# Altium PCB PCB-15_19_prototyp1.PcbDoc (part 1 of 4)
Units mm, origin at the board's own origin, x right, y up, seen from the top; angles counter-clockwise.
Board outline 190 x 150 mm, 8 copper layers (Top Layer, VCC3V3, Layer 2, layer 3, layer 4, layer 5, GND, Bottom Layer), stack 1.682 mm thick; 129 components, 396 nets, 1206 pads, 615 vias.
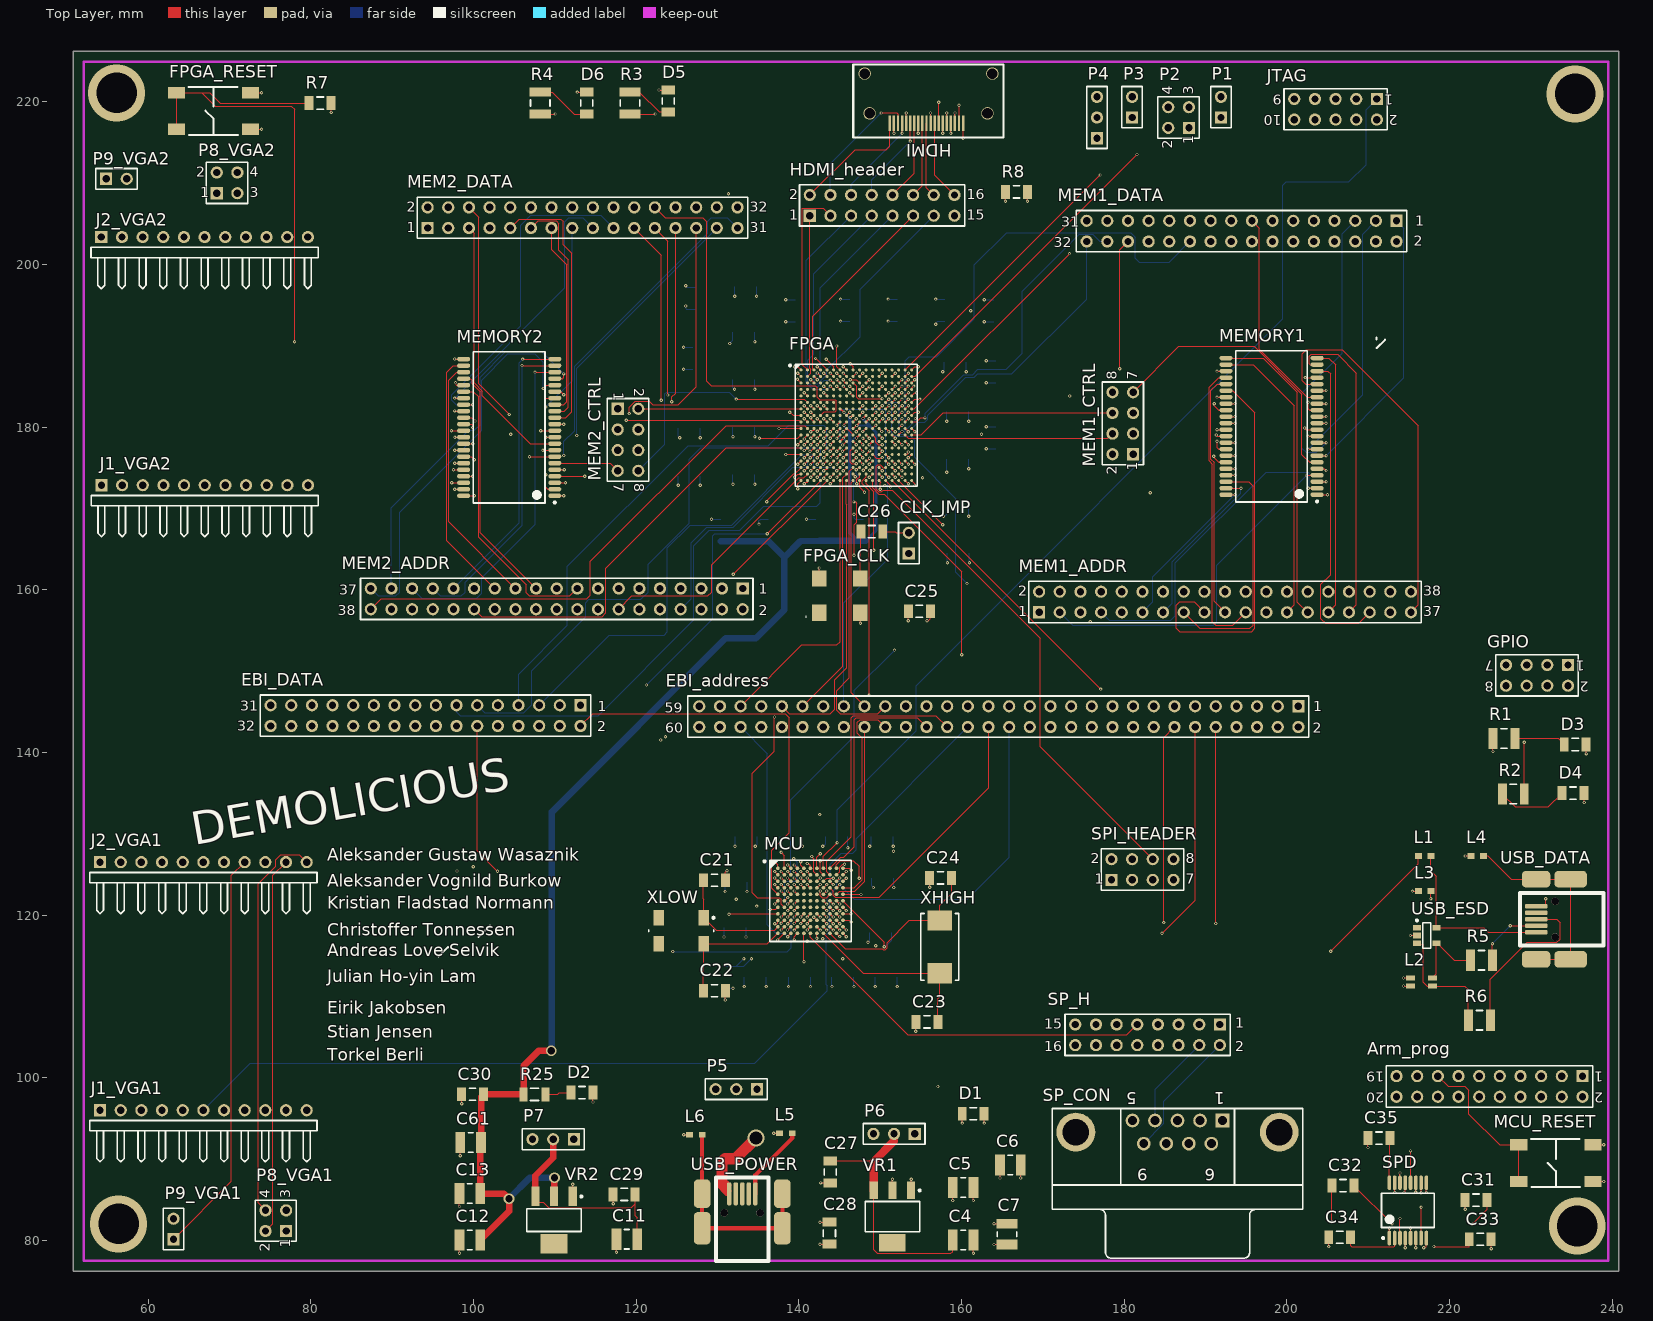
[diagram p0: Top Layer view]
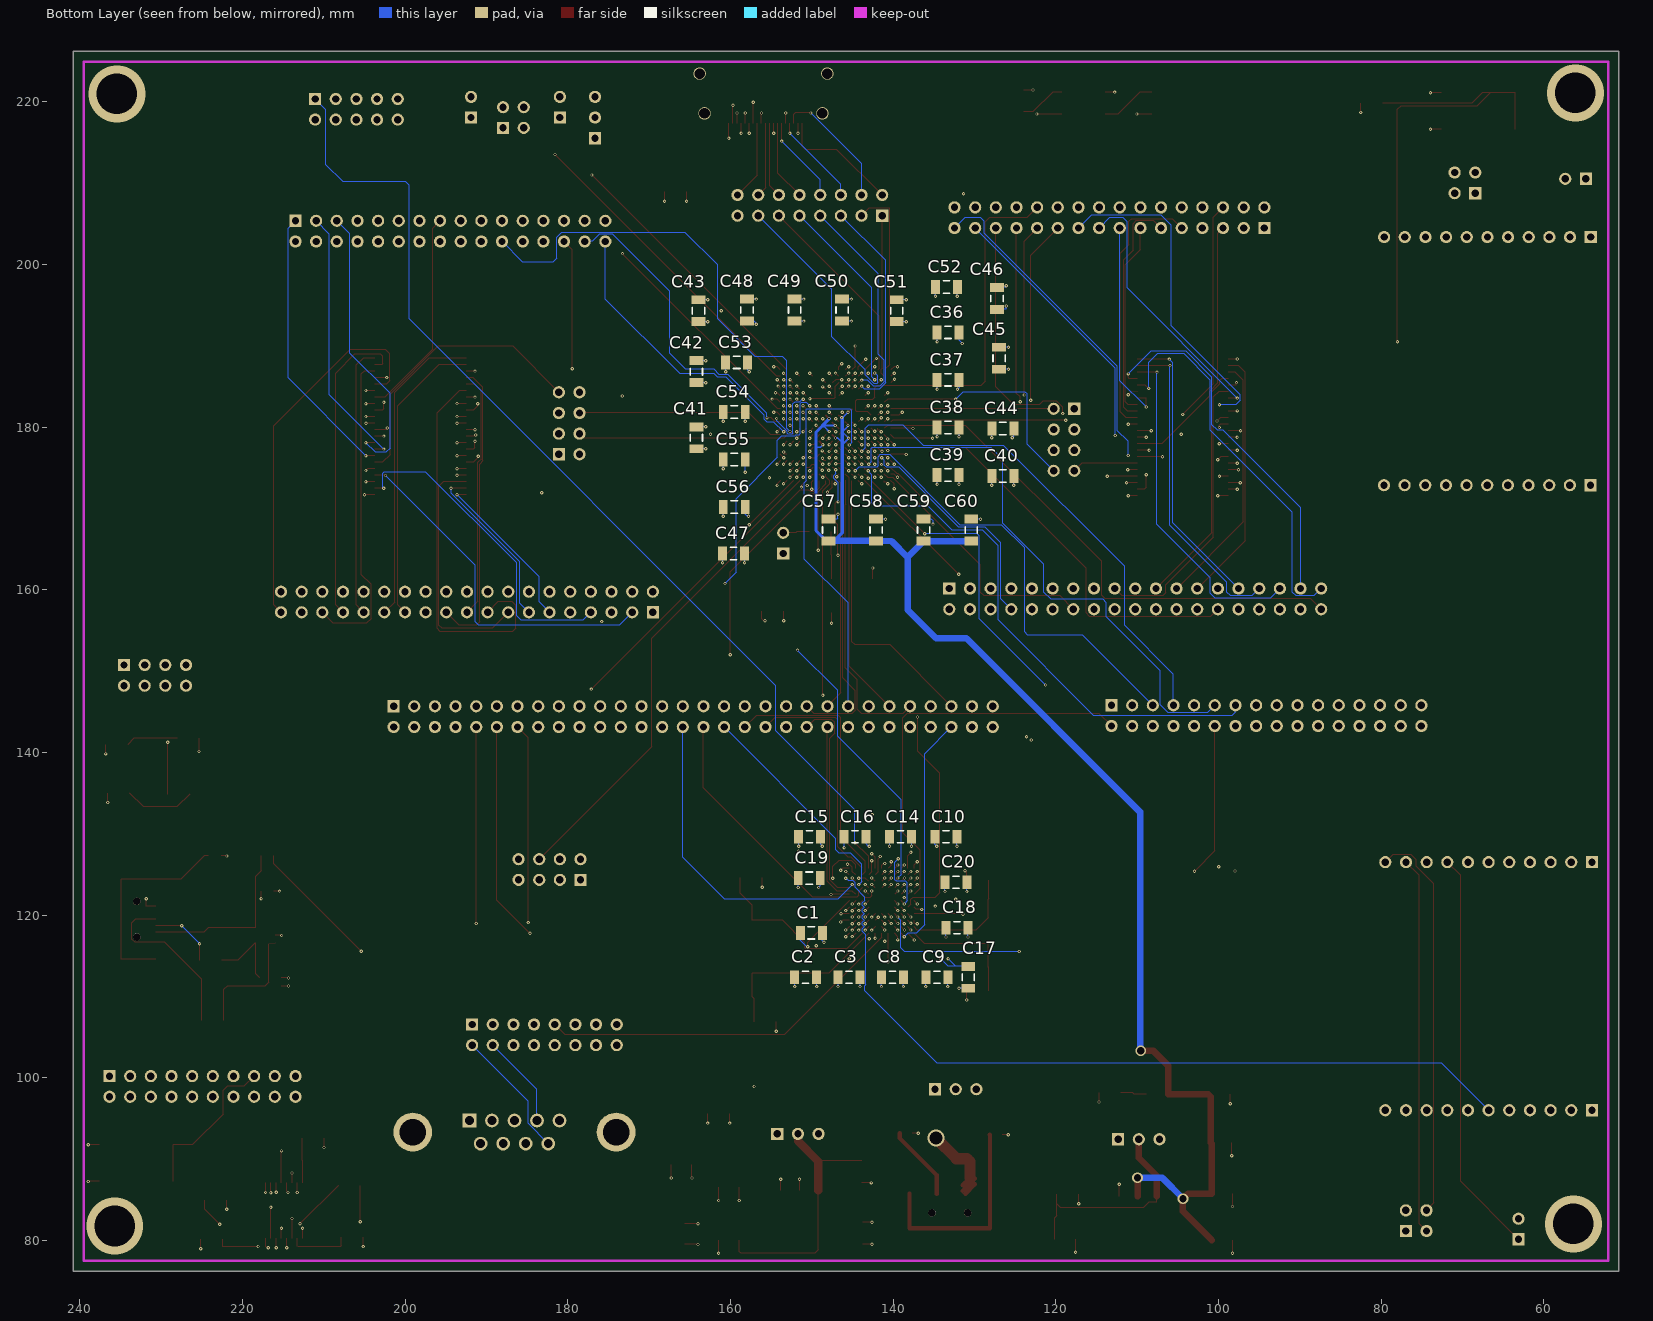
[diagram p1: Bottom Layer view, seen from below]
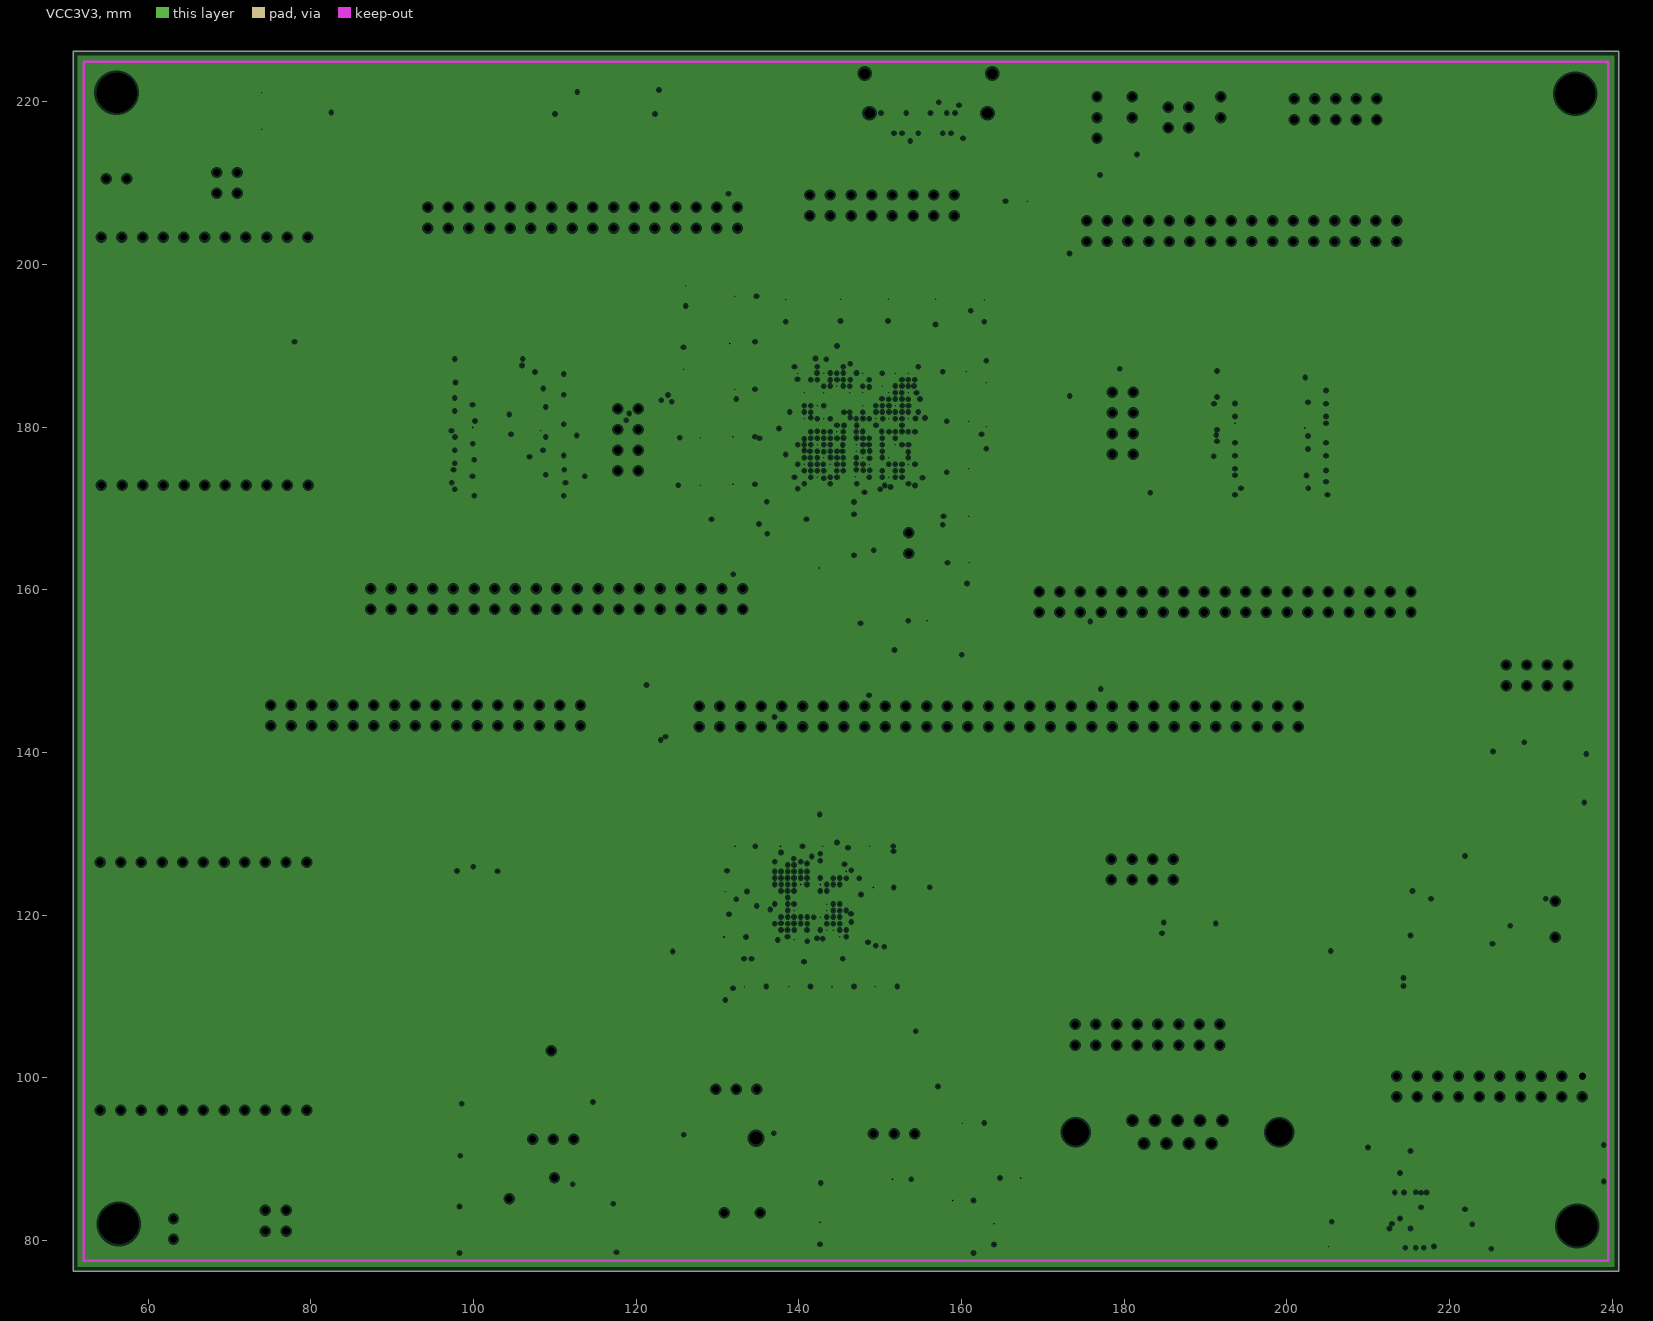
[diagram p2: VCC3V3, clearances drawn from the general rule]
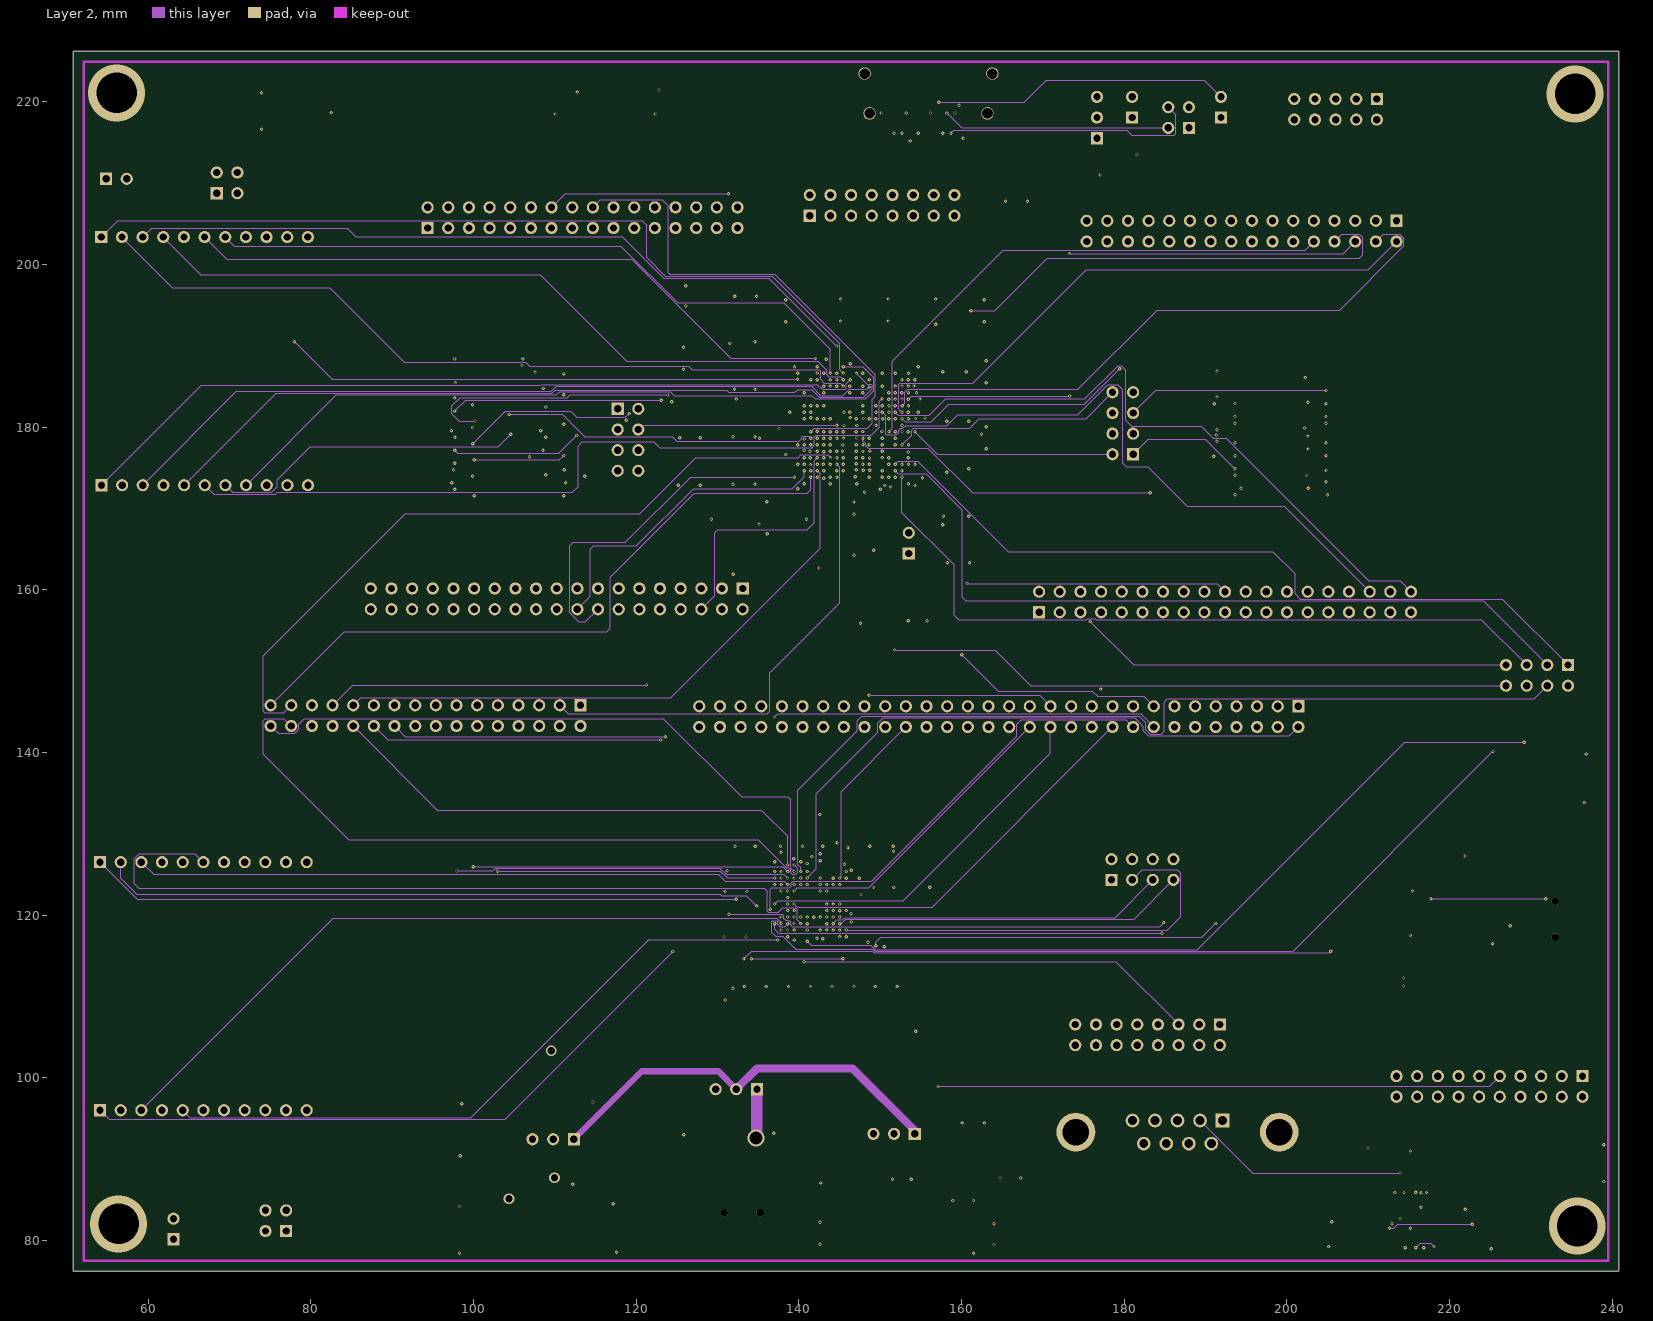
[diagram p3: Layer 2]
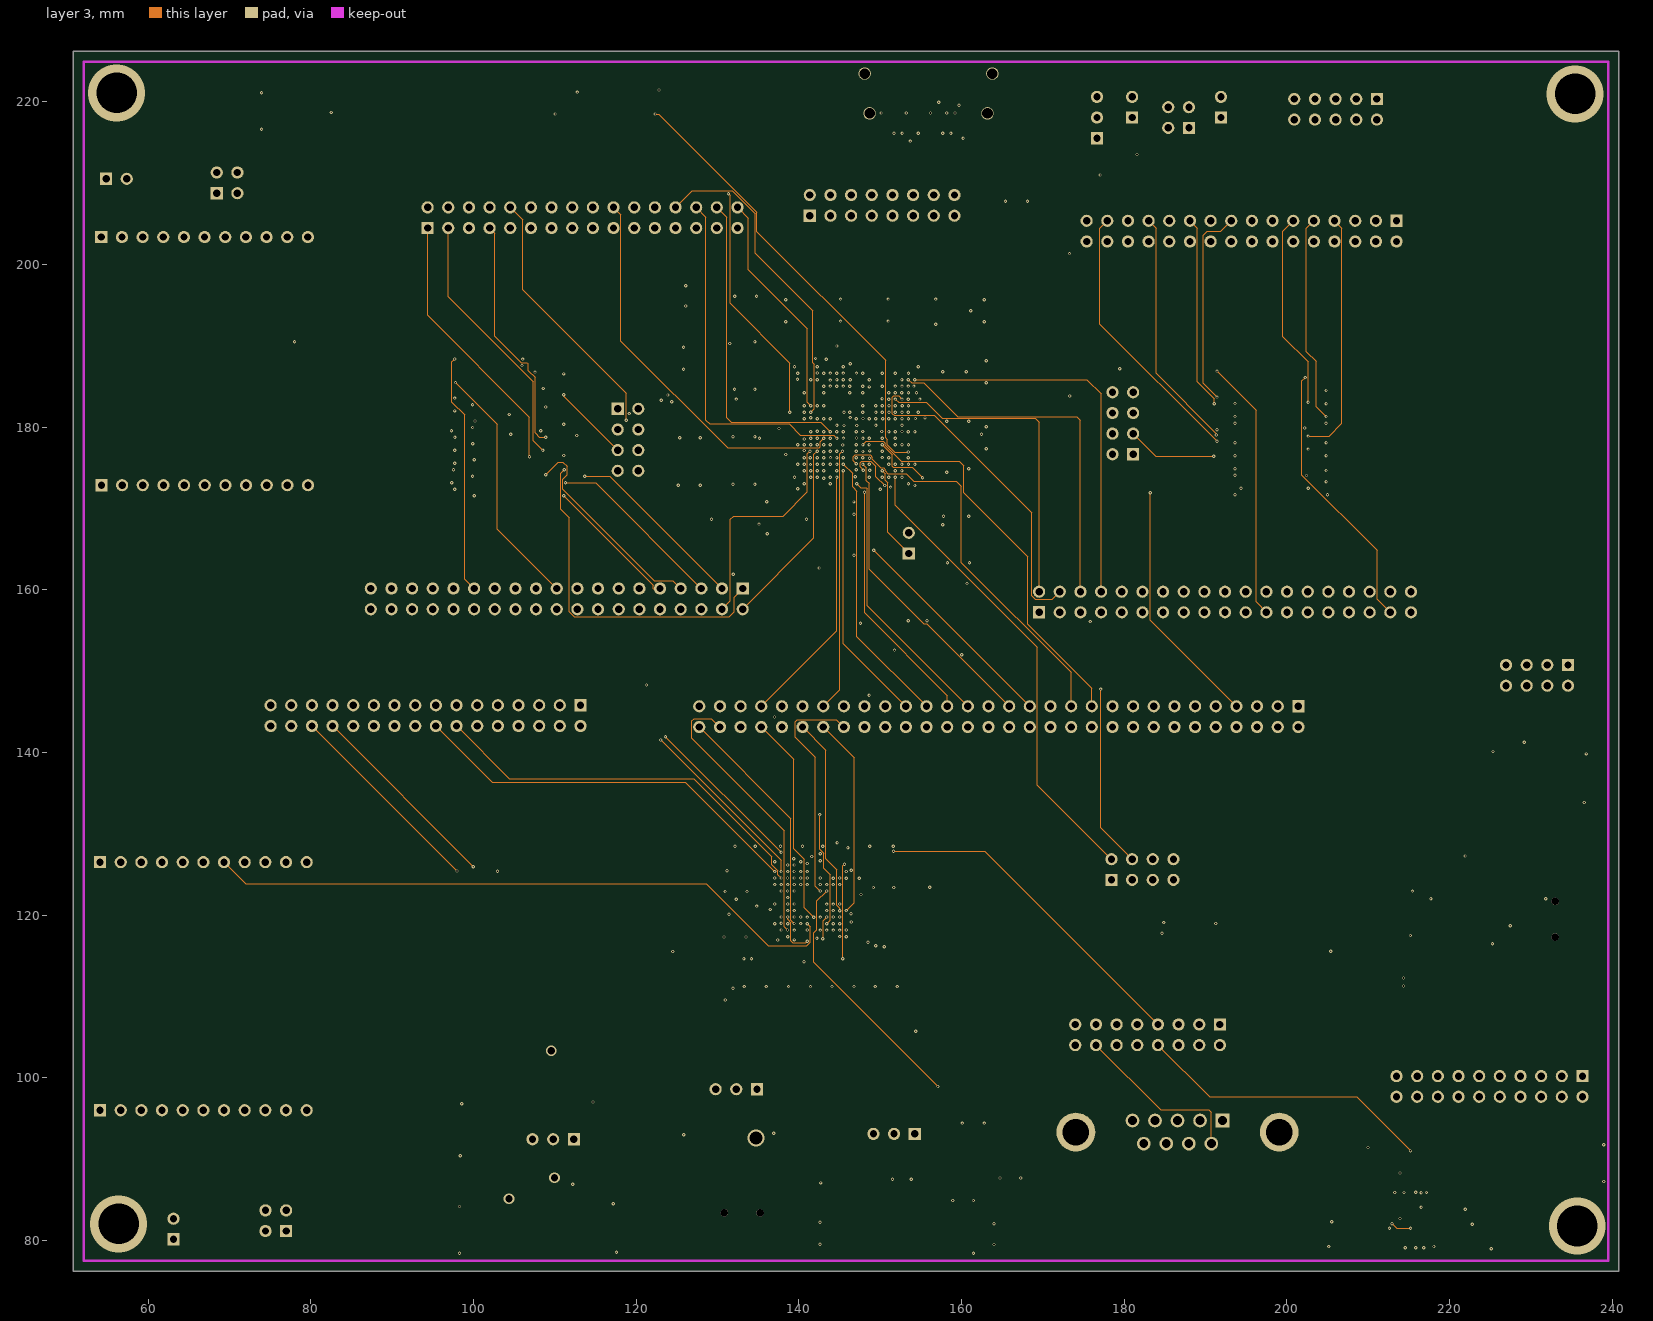
[diagram p4: layer 3]
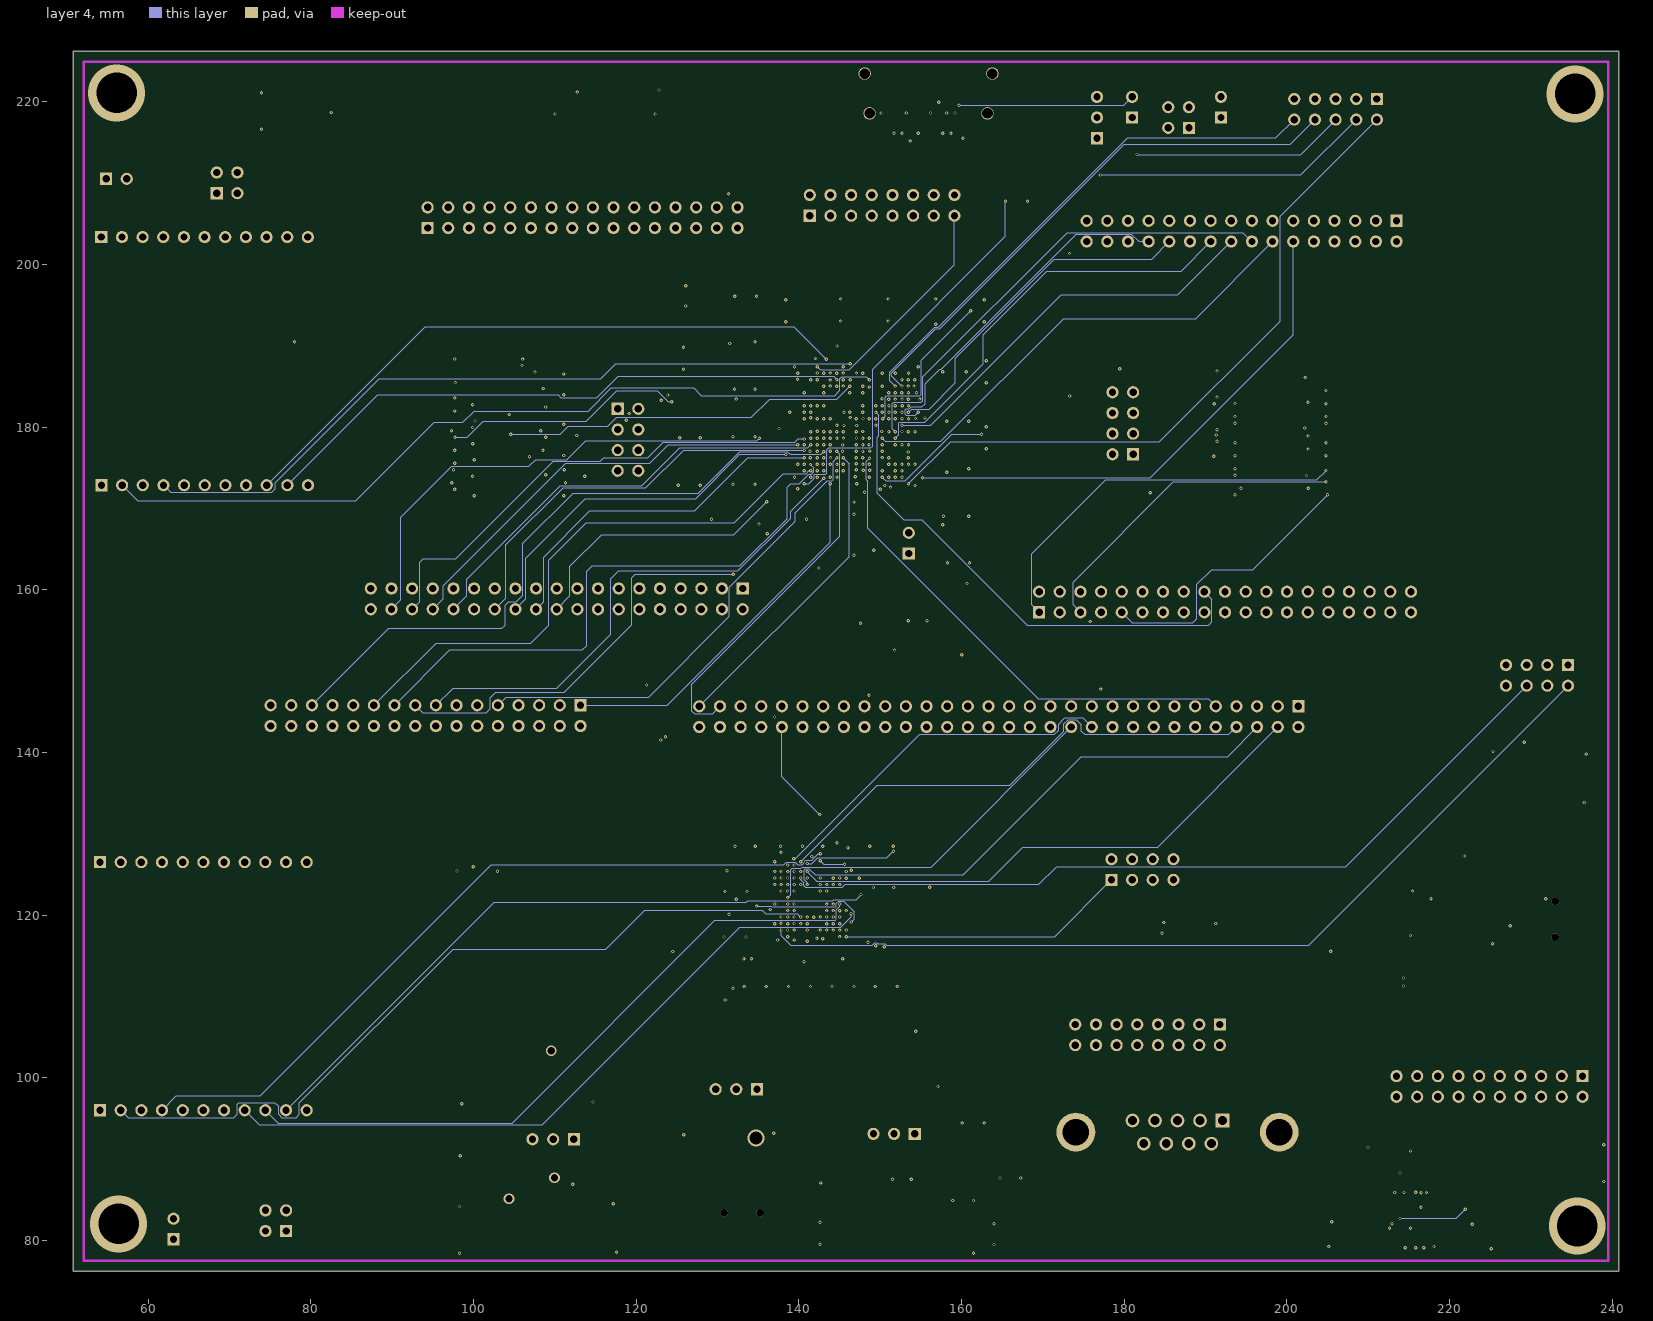
[diagram p5: layer 4]
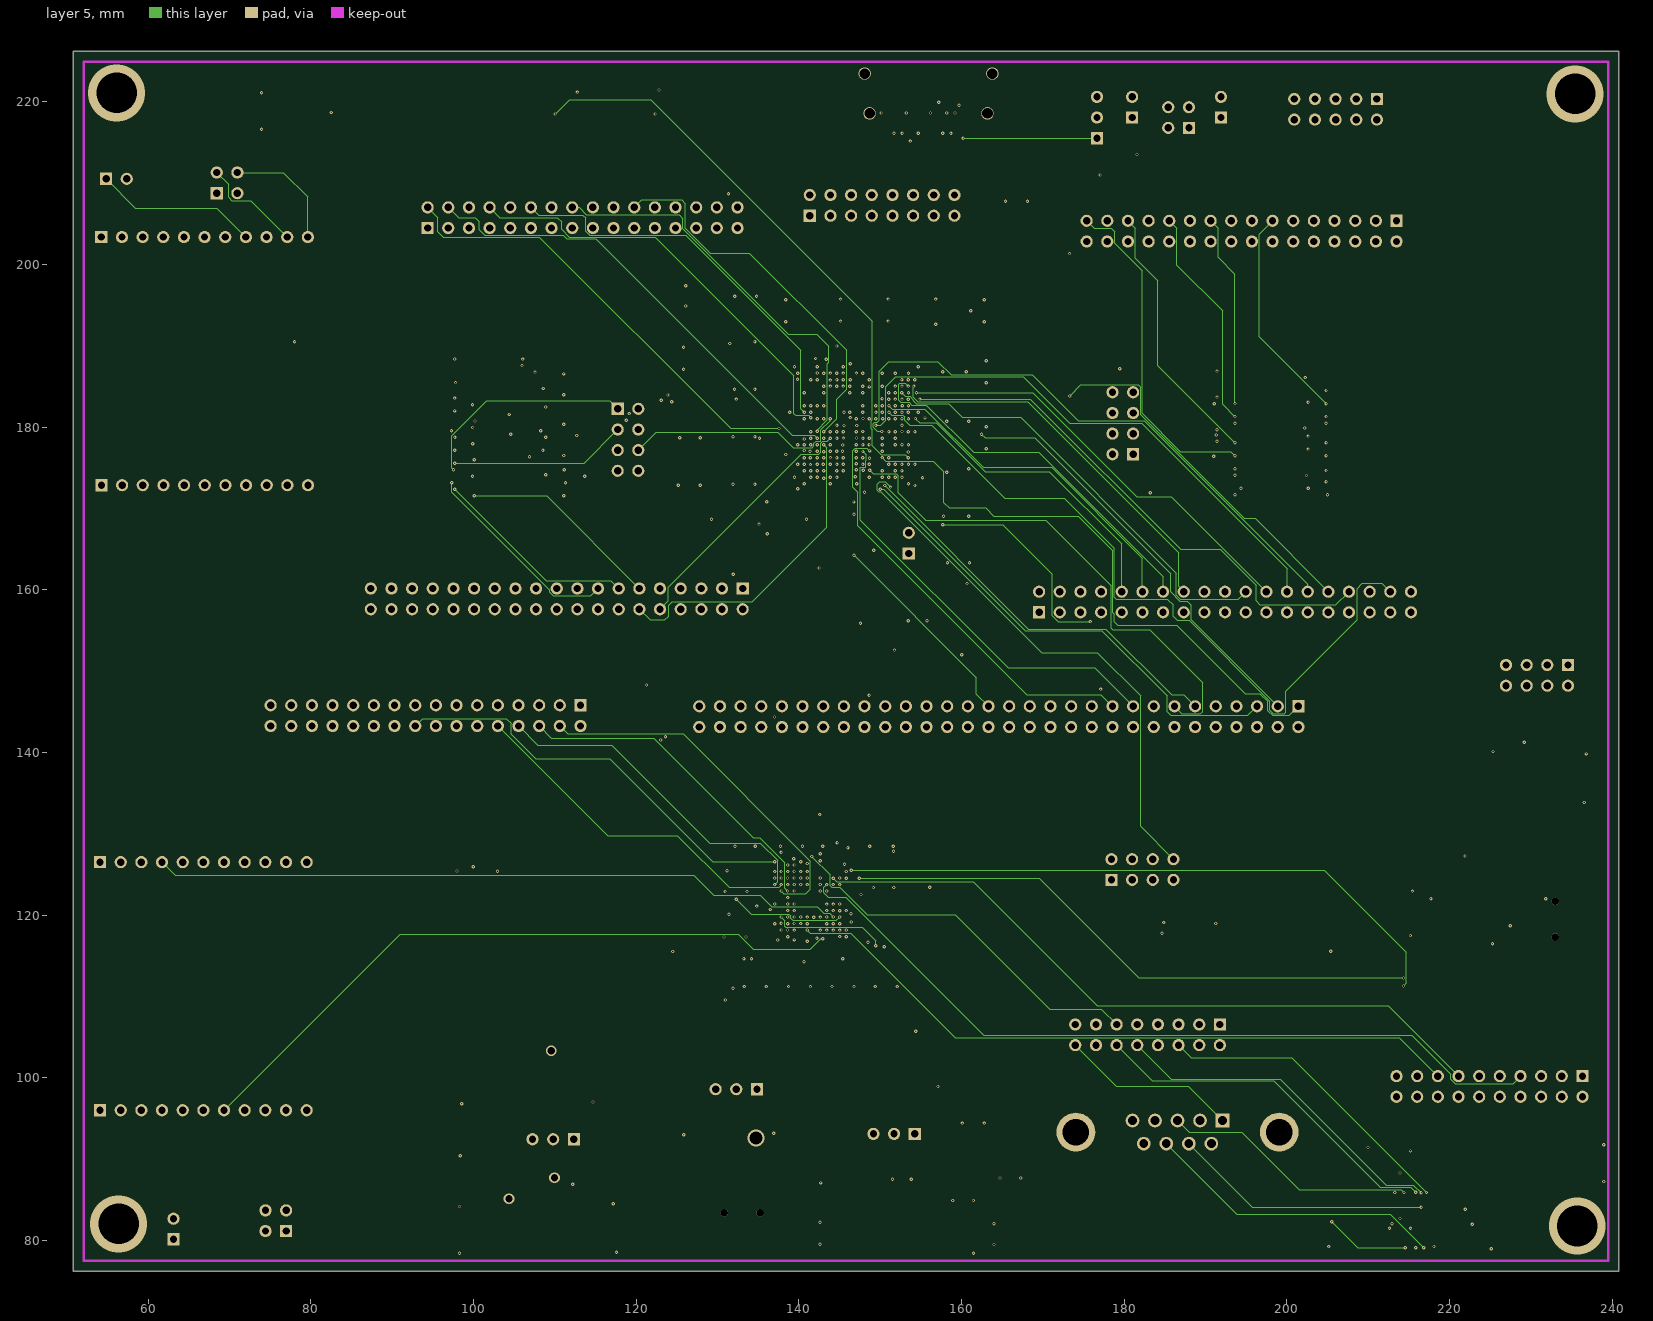
[diagram p6: layer 5]
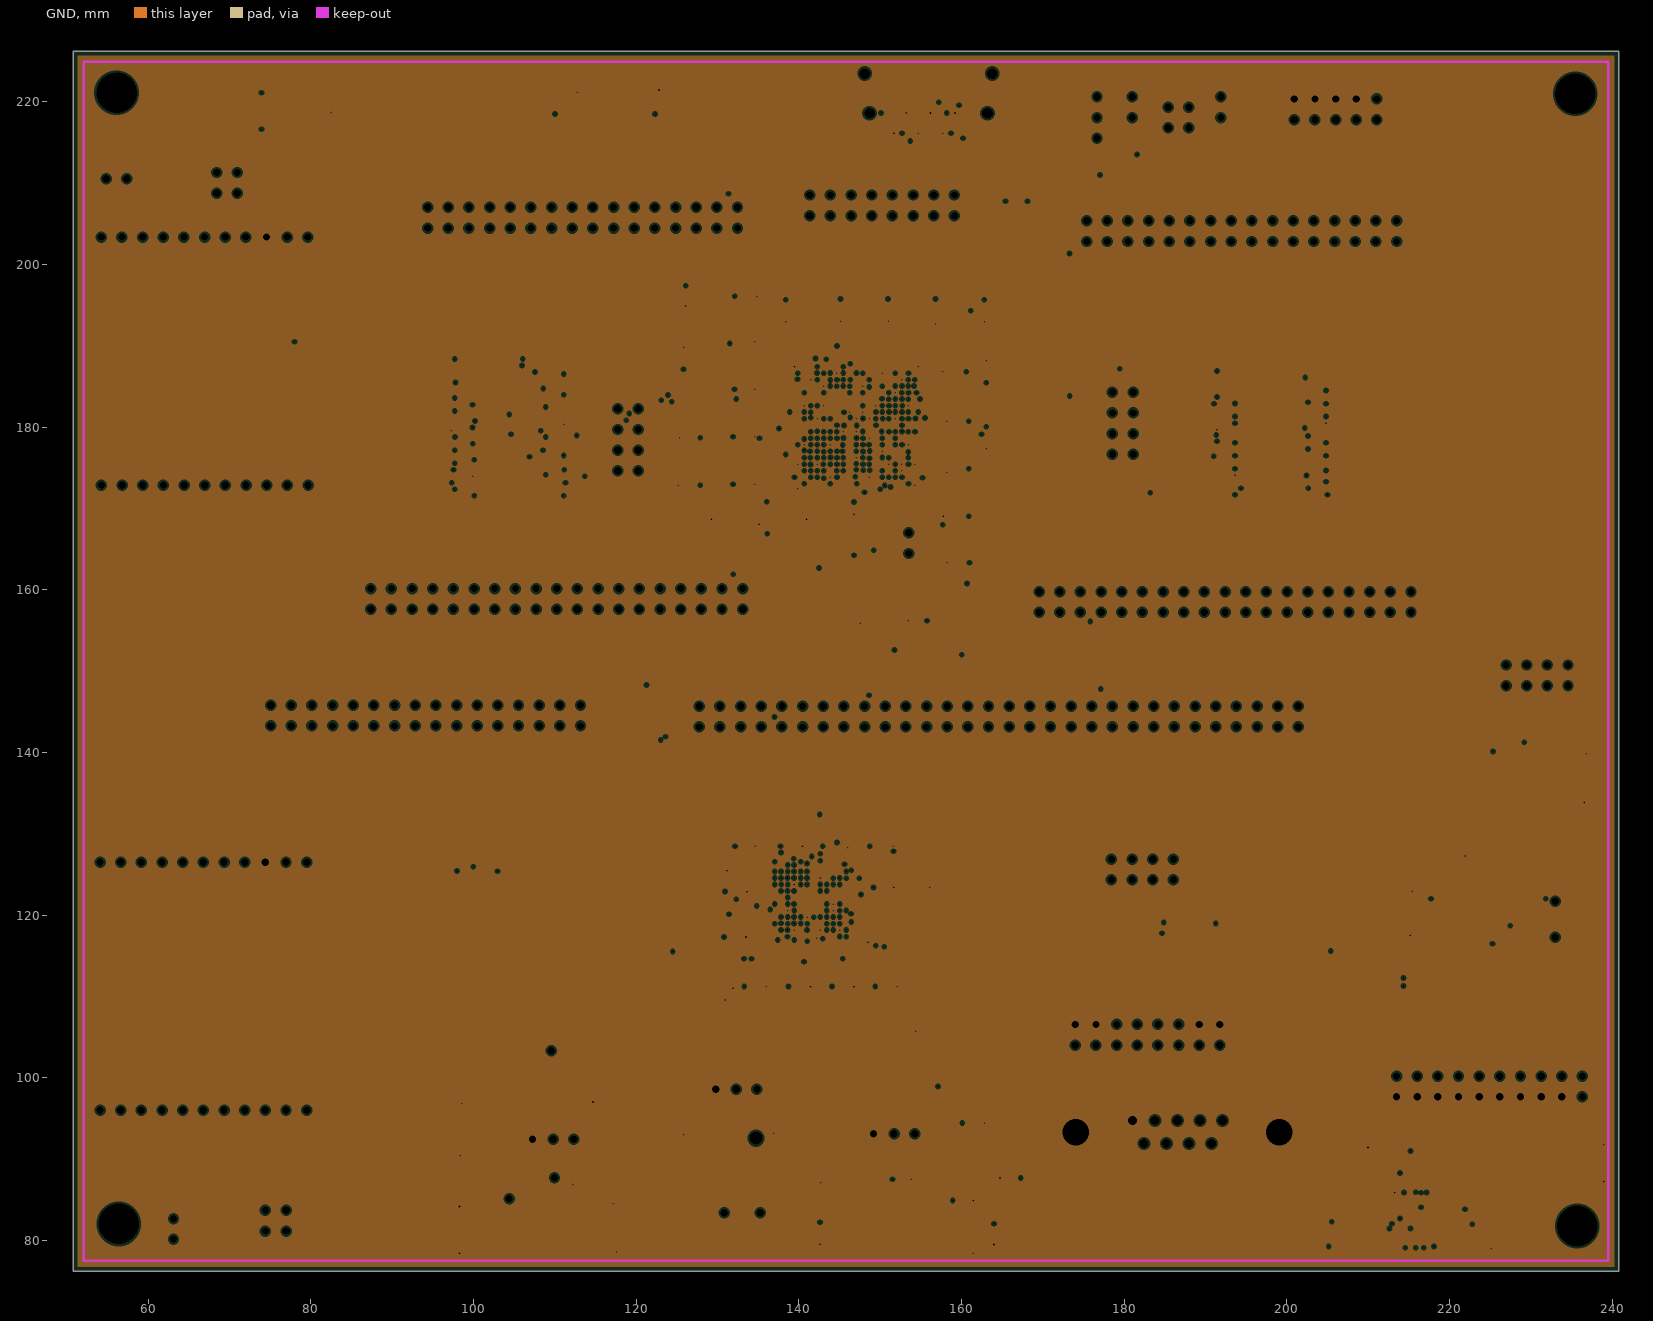
[diagram p7: GND, clearances drawn from the general rule]

## Layer stack, top to bottom
Top Solder: solder mask 0.0102, Solder Resist, Dk 3.5
Top Layer: signal copper 0.0356
Dielectric 1: core 0.254, FR-4, Dk 4.2
VCC3V3: plane copper 0.0356, net 3.3V
Dielectric 6: prepreg 0.127, Dk 4.2
Layer 2: signal copper 0.0356
Dielectric 4: core 0.254, Dk 4.2
layer 3: signal copper 0.036
Dielectric 5: prepreg 0.127, Dk 4.2
layer 4: signal copper 0.036
Dielectric 7: core 0.254, Dk 4.2
layer 5: signal copper 0.0356
Dielectric3: prepreg 0.127, FR-4, Dk 4.2
GND: plane copper 0.0356, net GND
Dielectric2: core 0.254, FR-4, Dk 4.2
Bottom Layer: signal copper 0.0356
Bottom Solder: solder mask 0.0102, Solder Resist, Dk 3.5

## Board outline
50.8,76.2 240.8,76.2 240.8,226.2 50.8,226.2

## Design rules (kind name [scope] priority, off if disabled: settings)
Clearance FPGA_and_MCU [All] p1: gap=0.1
Clearance [All] p2: gap=0.1
MinimumAnnularRing [All] p1: minimumring=0.1
MinimumSolderMaskSliver [All] p1: minsoldermaskwidth=0.1
PlaneClearance [All] p1: clearance=0.254
PlaneConnect [All] p1: planeconnectstyle=Direct reliefexpansion=0.508 reliefentries=4 reliefconductorwidth=0.254 reliefairgap=0.254
PolygonConnect [All] p1: connectstyle=Relief reliefconductorwidth=0.254 reliefentries=4 polygonreliefangle="90 Angle" airgapwidth=0.254
RoutingVias [All] p1: holewidth=0.2 width=0.4 viastyle="Through Hole" minholewidth=0.2 minwidth=0.35 maxholewidth=1 maxwidth=3
SMDNeckDown [All] p1: percent=100.000
SolderMaskExpansion SolderMaskExpansion_1 [HasFootprint('CSG324')  Or HasFootprint('ENMR-BGA112')] p1: expansion=0.06
SolderMaskExpansion [All] p2: expansion=0.102
UnpouredPolygon [All] p1: allowunpoured=FALSE
Width Small_lines [HasFootprint('HDR2X30') or HasFootprint('HDR2x16') or HasFootprint('HDR2X4') or HasFootprint('ENMR-BGA112') or HasFootprint('CSG324') or HasFootprint('HDR2X19') or HasFootprint('AS7C38098A-10TIN')] p1: maxlimit=0.2 minlimit=0.1 preferedwidth=0.1
Width [All] p2: maxlimit=3 minlimit=0.1 preferedwidth=0.1
26 further rules are at their usual default settings.

## Classes and differential pairs
channel class VGA: VGA1 VGA2
channel class SRAM: Data_mem1 Data_mem2
net class DATA[15..0]: DATA0 DATA1 DATA2 DATA3 DATA4 DATA5 DATA6 DATA7 DATA8 DATA9 DATA10 DATA11 DATA12 DATA13 DATA14 DATA15
net class DATA1.BUS[0..15]: DATA1.BUS0 DATA1.BUS1 DATA1.BUS2 DATA1.BUS3 DATA1.BUS4 DATA1.BUS5 DATA1.BUS6 DATA1.BUS7 DATA1.BUS8 DATA1.BUS9 DATA1.BUS10 DATA1.BUS11 DATA1.BUS12 DATA1.BUS13 DATA1.BUS14 DATA1.BUS15
net class DATA1.ADDR[0..18]: DATA1.ADDR0 DATA1.ADDR1 DATA1.ADDR2 DATA1.ADDR3 DATA1.ADDR4 DATA1.ADDR5 DATA1.ADDR6 DATA1.ADDR7 DATA1.ADDR8 DATA1.ADDR9 DATA1.ADDR10 DATA1.ADDR11 DATA1.ADDR12 DATA1.ADDR13 DATA1.ADDR14 DATA1.ADDR15 DATA1.ADDR16 DATA1.ADDR17 DATA1.ADDR18
net class DATA0.BUS[0..15]: DATA0.BUS0 DATA0.BUS1 DATA0.BUS2 DATA0.BUS3 DATA0.BUS4 DATA0.BUS5 DATA0.BUS6 DATA0.BUS7 DATA0.BUS8 DATA0.BUS9 DATA0.BUS10 DATA0.BUS11 DATA0.BUS12 DATA0.BUS13 DATA0.BUS14 DATA0.BUS15
net class DATA0.ADDR[0..18]: DATA0.ADDR0 DATA0.ADDR1 DATA0.ADDR2 DATA0.ADDR3 DATA0.ADDR4 DATA0.ADDR5 DATA0.ADDR6 DATA0.ADDR7 DATA0.ADDR8 DATA0.ADDR9 DATA0.ADDR10 DATA0.ADDR11 DATA0.ADDR12 DATA0.ADDR13 DATA0.ADDR14 DATA0.ADDR15 DATA0.ADDR16 DATA0.ADDR17 DATA0.ADDR18
net class A[25..0]: A0 A1 A2 A3 A4 A5 A6 A7 A8 A9 A10 A11 A12 A13 A14 A15 A16 A17 A18 A19 A20 A21 A22 A23 A24 A25
component class VGA2: J1_VGA2 J2_VGA2 P8_VGA2 P9_VGA2
component class VGA1: J1_VGA1 J2_VGA1 P8_VGA1 P9_VGA1
component class USB_power: L5 L6 USB_POWER
component class USB_data: L1 L2 L3 L4 R5 R6 USB_DATA USB_ESD
component class Serial: C31 C32 C33 C34 C35 SP_CON SP_H SPD
component class Power_regulator: C4 C5 C6 C7 C11 C12 C13 C27 C28 C29 C30 C61 D1 D2 P5 P6 P7 R25 VR1 VR2
component class OSCILLATOR: C21 C22 C23 C24 C25 C26 FPGA_CLK XHIGH XLOW
component class MCU: Arm_prog C1 MCU MCU_RESET SPI_HEADER
component class MCU_IO: C2 C3 C8 C9 C10 C14 C15 C16 C17 C18 C19 C20
component class LEDs: D3 D4 D5 D6 R1 R2 R3 R4
component class JTAG: JTAG R8
component class FPGA_VCC: C36 C37 C38 C39 C40 C41 C42 C43 C44 C45 C46 C47 C48 C49 C50 C51 C52 C53 C54 C55 C56 C57 C58 C59 C60
component class FPGA_BANK_3: FPGA_RESET R7
component class FPGA_BANK_2: CLK_JMP EBI_address EBI_DATA GPIO
component class FPGA_BANK_0: FPGA
component class Data_mem2: MEM2_ADDR MEM2_CTRL MEM2_DATA MEMORY2
component class Data_mem1: MEM1_ADDR MEM1_CTRL MEM1_DATA MEMORY1

## Components (designator, comment, footprint, x,y, rotation, side; value= is the part's Value field where it differs from the comment)
Arm_prog "Header 10X2" HDR2X10 236.347,100.203 r180 top
C1 "" C1206 150.065,117.817 r180 bottom
C2 "Ciovdd_0" C1206 150.76,112.356 r180 bottom
C3 "Ciovdd_1" C1206 145.426,112.356 r180 bottom
C4 "1210" CAPC1210(3225)105_L 160.19,80.04 r180 top
C5 "1210" CAPC1210(3225)105_L 160.19,86.51 r180 top
C6 "1210" CAPC1210(3225)105_L 166.01,89.28 r0 top
C7 "1210" CAPC1210(3225)105_L 165.6,80.78 r90 top
C8 "Ciovdd_2" C1206 140.092,112.356 r180 bottom
C9 "Ciovdd_3" C1206 134.631,112.356 r180 bottom
C10 "Ciovdd_4" C1206 133.508,129.628 r180 bottom
C11 "1210" CAPC1210(3225)105_L 118.85,80.15 r0 top
C12 "1210" CAPC1210(3225)105_L 99.55,80.04 r0 top
C13 "1210" CAPC1210(3225)105_L 99.55,85.77 r0 top
C14 "Ciovdd_5" C1206 139.096,129.628 r180 bottom
C15 "Ciovdd_6" C1206 150.272,129.628 r180 bottom
C16 "Cdreg" C1206 144.684,129.628 r180 bottom
C17 "Cvregi" C1206 130.761,112.356 r90 bottom
C18 "Cavdd_0" C1206 132.158,118.452 r180 bottom
C19 "Cavdd_1" C1206 150.319,124.548 r180 bottom
C20 "Cavdd_2" C1206 132.285,124.04 r0 bottom
C21 "CL1" C1206 129.618,124.294 r180 top
C22 "CL2" C1206 129.618,110.705 r180 top
C23 "CL1" C1206 155.74,106.87 r0 top
C24 "CL2" C1206 157.44,124.57 r0 top
C25 "bypass cap" C1206 154.813,157.353 r180 top
C26 "bypass cap" C1206 148.971,167.148 r0 top
C27 "4.7uF" C1206 143.86,88.42 r90 top
C28 "10uF" C1206 143.76,80.89 r90 top
C29 "4.7uF" C1206 118.53,85.66 r0 top
C30 "10uF" C1206 99.9,97.97 r0 top
C31 "Ciovdd_5" C1206 223.266,84.963 r0 top
C32 "Ciovdd_5" C1206 206.883,86.741 r180 top
C33 "Ciovdd_5" C1206 223.774,80.137 r180 top
C34 "Ciovdd_5" C1206 206.502,80.391 r0 top
C35 "Ciovdd_5" C1206 211.328,92.583 r0 top
C36 "Cvcco_0" C1206 133.251,191.637 r0 bottom
C37 "Cvcco_0" C1206 133.251,185.795 r0 bottom
C38 "Cvcco_0" C1206 133.251,179.953 r180 bottom
C39 "Cvcco_0" C1206 133.251,174.111 r180 bottom
C40 "Cvcco_1" C1206 126.52,173.984 r180 bottom
C41 "Cvcco_1" C1206 164.192,178.683 r270 bottom
C42 "Cvcco_1" C1206 164.192,186.811 r90 bottom
C43 "Cvcco_1" C1206 163.938,194.304 r90 bottom
C44 "Cvcco_2" C1206 126.52,179.826 r180 bottom
C45 "Cvcco_2" C1206 126.981,188.462 r90 bottom
C46 "Cvcco_2" C1206 127.235,195.828 r90 bottom
C47 "Cvcco_2" C1206 159.62,164.459 r0 bottom
C48 "Cvcco_3" C1206 157.969,194.384 r270 bottom
C49 "Cvcco_3" C1206 152.127,194.384 r270 bottom
C50 "Cvcco_3" C1206 146.285,194.384 r90 bottom
C51 "Cvcco_3" C1206 139.554,194.304 r90 bottom
C52 "Cvccaux" C1206 133.458,197.225 r180 bottom
C53 "Cvccaux" C1206 159.239,187.954 r0 bottom
C54 "Cvccaux" C1206 159.54,181.858 r180 bottom
C55 "Cvccaux" C1206 159.54,176.016 r180 bottom
C56 "Cvccaux" C1206 159.54,170.174 r180 bottom
C57 "Cvccint" C1206 147.936,167.333 r270 bottom
C58 "Cvccint" C1206 142.094,167.333 r270 bottom
C59 "Cvccint" C1206 136.252,167.333 r90 bottom
C60 "Cvccint" C1206 130.41,167.333 r90 bottom
C61 "1210" CAPC1210(3225)105_L 99.66,92.02 r0 top
CLK_JMP "Header 2" HDR1X2 153.524,164.459 r90 top (schematic designator FPGA_CLK_JMP)
D1 "LED2" C1206 161.44,95.58 r0 top
D2 "LED2" C1206 113.34,98.17 r0 top
D3 "LED2" C1206 235.458,140.97 r0 top
D4 "LED2" C1206 235.204,135.001 r0 top
D5 "LED2" C1206 123.952,220.091 r90 top
D6 "LED2" C1206 113.919,219.837 r90 top
EBI_address "EBI adr" HDR2X30 201.422,145.669 r180 top
EBI_DATA "Backup header for EBI Data" HDR2X16 113.157,145.796 r180 top
FPGA "XC6SLX45-2CSG324I" CSG324 147.07,180.23 r0 top
FPGA_CLK "120MHz" OSCI-4FPGA 145.034,159.274 r90 top
FPGA_RESET "FSM2JSMA" Button 72.6,216.62 r90 top
GPIO "Header 4X2" HDR2X4 234.569,150.749 r180 top
HDMI_header "Header 8X2" HDR2X8 141.351,205.994 r0 top
J1_VGA1 "Header 11H" HDR1X11H 54.09,96.012 r0 top (schematic designator J1)
J1_VGA2 "Header 11H" HDR1X11H 54.26,172.86 r0 top (schematic designator J1)
J2_VGA1 "Header 11H" HDR1X11H 54.09,126.51 r0 top (schematic designator J2)
J2_VGA2 "Header 11H" HDR1X11H 54.24,203.36 r0 top (schematic designator J2)
JTAG "JTAG" HDR2X5 211.074,220.345 r180 top
L1 "742792641" SMD-0603 216.938,127.271 r0 top
L2 "744232161" WE-CNSW-1206 216.557,111.777 r0 top
L3 "742792641" SMD-0603 216.938,122.953 r0 top
L4 "742792641" SMD-0603 223.415,127.271 r0 top
L5 "742792641" SMD-0603 138.42,93.18 r0 top
L6 "742792641" SMD-0603 127.35,92.99 r0 top
MCU "EFM32GG990F1024-BGA112" ENMR-BGA112 141.429,121.754 r0 top
MCU_RESET "FSM2JSMA" Button 237.617,87.249 r90 top
MEM1_ADDR "Header 19X2" HDR2X19 169.545,157.226 r0 top (schematic designator MEM_ADDR_JUMPER)
MEM1_CTRL "Header 4X2" HDR2X4 181.102,176.657 r90 top (schematic designator MEM_CONTROL_JUMPER)
MEM1_DATA "Header 16X2" HDR2X16 213.487,205.359 r180 top (schematic designator MEM_BUS_JUMPER)
MEM2_ADDR "Header 19X2" HDR2X19 133.096,160.147 r180 top (schematic designator MEM_ADDR_JUMPER)
MEM2_CTRL "Header 4X2" HDR2X4 117.729,182.245 r270 top (schematic designator MEM_CONTROL_JUMPER)
MEM2_DATA "Header 16X2" HDR2X16 94.361,204.47 r0 top (schematic designator MEM_BUS_JUMPER)
MEMORY1 "SRAM-AS7C38098A" AS7C38098A-10TIN 198.12,180.086 r180 top (schematic designator MEMORY)
MEMORY2 "SRAM-AS7C38098A" AS7C38098A-10TIN 104.394,179.959 r180 top (schematic designator MEMORY)
P1 "CEC" HDR1X2 191.897,218.059 r90 top
P2 "SCL_SCD" HDR2X2 187.96,216.789 r90 top
P3 "+5V" HDR1X2 180.975,218.059 r90 top
P4 "Header 3" HDR1X3 176.657,215.519 r90 top
P5 "PW_5V" HDR1X3 134.85,98.6 r180 top
P6 "PW_H2" HDR1X3 154.25,93.1 r180 top
P7 "PW_H3" HDR1X3 112.34,92.44 r180 top
P8_VGA1 "Header 2X2" HDR2X2 76.962,81.153 r90 top (schematic designator P8)
P8_VGA2 "Header 2X2" HDR2X2 68.43,208.76 r0 top (schematic designator P8)
P9_VGA1 "Emergency 3.3V supply at most 400mA" HDR1X2 63.119,80.137 r90 top (schematic designator P9)
P9_VGA2 "Emergency 3.3V supply at most 400mA" HDR1X2 54.83,210.52 r0 top (schematic designator P9)
R1 "Res3" 14-1210 226.695,141.732 r0 top
R2 "Res3" 14-1210 227.838,134.874 r180 top
R3 "Res3" 14-1210 119.253,219.837 r90 top
R4 "Res3" 14-1210 108.204,219.837 r90 top
R5 "R_usb_dm" 14-1210 223.923,114.444 r0 top
R6 "R_usb_dp" 14-1210 223.669,107.078 r0 top
R7 "Res1" C1206 81.153,219.837 r0 top
R8 "Res3" C1206 166.751,208.915 r0 top
R25 "Res 1206" RESC1206(3216)_L 107.51,97.96 r0 top
SP_CON "D Connector 9" DSUB1.385-2H9 186.563,83.82 r180 top
SP_H "Header 8X2" HDR2X8 191.77,106.553 r180 top
SPD "MAX3232CDBE4" TI-DB16_L 214.884,83.693 r90 top
SPI_HEADER "SPI_header" HDR2X4 178.435,124.333 r0 top
USB_DATA "67503-1020" MOLX-67503-1020_V 230.67,117.89 r180 top
USB_ESD "#NAME?" SOT95P275X140-5N 217.192,117.492 r0 top
USB_POWER "67503-1020" MOLX-67503-1020_V 131.445,85.725 r90 top
VR1 "ADP3339AKCZ-3.3-R7" ADI-KC-3_M 151.511,82.931 r270 top
VR2 "NCP566-1.2" SOT223_N 109.906,82.506 r270 top
XHIGH "48MHz" XTAL-85 157.33,116.09 r90 top
XLOW "32.783KHz" MC-306 125.554,118.071 r270 top
? "HDMI_connector" HDMI-type-A 163.195,218.567 r180 top

## Footprints (in the part's own frame and the unit in brackets; to place one, negate y for a bottom-side part, rotate by r counter-clockwise, add the part's x,y. Pads: shape width x height; smd on the part's side, far side on the other; paste and mask are expansions set on the pad)
14-1210 [mm] "Chip Resistor, Body 3.2x2.5mm, IPC High Density"
  rect 1.1x2.6 smd: 1(-1.35,0) 2(1.35,0)
  silkscreen extent -0.4,-1.2 0.4,1.2, body extent -1.68,-1.32 1.68,1.32, height 0.9
ADI-KC-3_M [mm] "SOT223, 4-Leads, Body 6.5x3.5mm, Pitch 2.3mm, IPC Low Density"
  rect 2.15x1 smd: 1(-3.225,2.3) 2(-3.225,0) 3(-3.225,-2.3)
  rect 2.15x3.25 smd: 4(3.225,0)
  silkscreen extent -3.35,-3.35 1.85,3.48, body extent -1.85,-3.35 1.85,3.35, height 1.8
AS7C38098A-10TIN [mm] "TSOPII, 44-Leads, Body 18,41x10,16mm, Pitch 0,80mm, IPC Medium Density"
  oval 1.6x0.55 smd: 1(-5.6,8.4) 2(-5.6,7.6) 3(-5.6,6.8) 4(-5.6,6) 5(-5.6,5.2) 6(-5.6,4.4) 7(-5.6,3.6) 8(-5.6,2.8) 9(-5.6,2) 10(-5.6,1.2) 11(-5.6,0.4) 12(-5.6,-0.4) 13(-5.6,-1.2) 14(-5.6,-2) 15(-5.6,-2.8) 16(-5.6,-3.6) 17(-5.6,-4.4) 18(-5.6,-5.2) 19(-5.6,-6) 20(-5.6,-6.8) 21(-5.6,-7.6) 22(-5.6,-8.4) 23(5.6,-8.4) 24(5.6,-7.6) 25(5.6,-6.8) 26(5.6,-6) 27(5.6,-5.2) 28(5.6,-4.4) 29(5.6,-3.6) 30(5.6,-2.8) 31(5.6,-2) 32(5.6,-1.2) 33(5.6,-0.4) 34(5.6,0.4) 35(5.6,1.2) 36(5.6,2) 37(5.6,2.8) 38(5.6,3.6) 39(5.6,4.4) 40(5.6,5.2) 41(5.6,6) 42(5.6,6.8) 43(5.6,7.6) 44(5.6,8.4)
  silkscreen extent -5.72,-9.3 4.4,9.35, body extent -5.2,-9.3 5.2,9.3, height 1.2
Button [mm] "copied from 256 SoG"
  rect 1.4x2.1 smd: 1(0,9.1) 2(0,0) 3(4.5,9.1) 4(4.5,0)
  silkscreen extent -0.7,1.55 5.21,7.62
C1206 [mm] "Chip Capacitor, Body 3.2x1.6mm, IPC High Density"
  rect 1.1x1.7 smd: 1(-1.35,0) 2(1.35,0)
  silkscreen extent -0.4,-0.75 0.4,0.75, body extent -1.7,-0.9 1.7,0.9, height 1.3
CAPC1210(3225)105_L [mm] "Chip Capacitor, Body 3.2x2.5mm, Height 1.05mm, IPC High Density"
  rect 1.2x2.6 smd: 1(-1.275,0) 2(1.275,0)
  silkscreen extent -0.3,-1.2 0.3,1.2, body extent -1.7,-1.35 1.7,1.35, height 1.05
CSG324 [mm] "BGA, 324-Leads, Body 15x15mm, Pitch 0.8mm"
  round 0.36 smd: A1(-6.8,6.8) A2(-6,6.8) A3(-5.2,6.8) A4(-4.4,6.8) A5(-3.6,6.8) A6(-2.8,6.8) A7(-2,6.8) A8(-1.2,6.8) A9(-0.4,6.8) A10(0.4,6.8) A11(1.2,6.8) A12(2,6.8) A13(2.8,6.8) A14(3.6,6.8) A15(4.4,6.8) A16(5.2,6.8) A17(6,6.8) A18(6.8,6.8) B1(-6.8,6) B2(-6,6) B3(-5.2,6) B4(-4.4,6) B5(-3.6,6) B6(-2.8,6) B7(-2,6) B8(-1.2,6) B9(-0.4,6) B10(0.4,6) B11(1.2,6) B12(2,6) B13(2.8,6) B14(3.6,6) B15(4.4,6) B16(5.2,6) B17(6,6) B18(6.8,6) C1(-6.8,5.2) C2(-6,5.2) C3(-5.2,5.2) C4(-4.4,5.2) C5(-3.6,5.2) C6(-2.8,5.2) C7(-2,5.2) C8(-1.2,5.2) C9(-0.4,5.2) C10(0.4,5.2) C11(1.2,5.2) C12(2,5.2) C13(2.8,5.2) C14(3.6,5.2) C15(4.4,5.2) C16(5.2,5.2) C17(6,5.2) C18(6.8,5.2) D1(-6.8,4.4) D2(-6,4.4) D3(-5.2,4.4) D4(-4.4,4.4) D5(-3.6,4.4) D6(-2.8,4.4) D7(-2,4.4) D8(-1.2,4.4) D9(-0.4,4.4) D10(0.4,4.4) D11(1.2,4.4) D12(2,4.4) D13(2.8,4.4) D14(3.6,4.4) D15(4.4,4.4) D16(5.2,4.4) D17(6,4.4) D18(6.8,4.4) E1(-6.8,3.6) E2(-6,3.6) E3(-5.2,3.6) E4(-4.4,3.6) E5(-3.6,3.6) E6(-2.8,3.6) E7(-2,3.6) E8(-1.2,3.6) E9(-0.4,3.6) E10(0.4,3.6) E11(1.2,3.6) E12(2,3.6) E13(2.8,3.6) E14(3.6,3.6) E15(4.4,3.6) E16(5.2,3.6) E17(6,3.6) E18(6.8,3.6) F1(-6.8,2.8) F2(-6,2.8) F3(-5.2,2.8) F4(-4.4,2.8) F5(-3.6,2.8) F6(-2.8,2.8) F7(-2,2.8) F8(-1.2,2.8) F9(-0.4,2.8) F10(0.4,2.8) F11(1.2,2.8) F12(2,2.8) F13(2.8,2.8) F14(3.6,2.8) F15(4.4,2.8) F16(5.2,2.8) F17(6,2.8) F18(6.8,2.8) G1(-6.8,2) G2(-6,2) G3(-5.2,2) G4(-4.4,2) G5(-3.6,2) G6(-2.8,2) G7(-2,2) G8(-1.2,2) G9(-0.4,2) G10(0.4,2) G11(1.2,2) G12(2,2) G13(2.8,2) G14(3.6,2) G15(4.4,2) G16(5.2,2) G17(6,2) G18(6.8,2) H1(-6.8,1.2) H2(-6,1.2) H3(-5.2,1.2) H4(-4.4,1.2) H5(-3.6,1.2) H6(-2.8,1.2) H7(-2,1.2) H8(-1.2,1.2) H9(-0.4,1.2) H10(0.4,1.2) H11(1.2,1.2) H12(2,1.2) H13(2.8,1.2) H14(3.6,1.2) H15(4.4,1.2) H16(5.2,1.2) H17(6,1.2) H18(6.8,1.2) J1(-6.8,0.4) J2(-6,0.4) J3(-5.2,0.4) J4(-4.4,0.4) J5(-3.6,0.4) J6(-2.8,0.4) J7(-2,0.4) J8(-1.2,0.4) J9(-0.4,0.4) J10(0.4,0.4) J11(1.2,0.4) J12(2,0.4) J13(2.8,0.4) J14(3.6,0.4) J15(4.4,0.4) J16(5.2,0.4) J17(6,0.4) J18(6.8,0.4) K1(-6.8,-0.4) K2(-6,-0.4) K3(-5.2,-0.4) K4(-4.4,-0.4) K5(-3.6,-0.4) K6(-2.8,-0.4) K7(-2,-0.4) K8(-1.2,-0.4) K9(-0.4,-0.4) K10(0.4,-0.4) K11(1.2,-0.4) K12(2,-0.4) K13(2.8,-0.4) K14(3.6,-0.4) K15(4.4,-0.4) K16(5.2,-0.4) K17(6,-0.4) K18(6.8,-0.4) L1(-6.8,-1.2) L2(-6,-1.2) L3(-5.2,-1.2) L4(-4.4,-1.2) L5(-3.6,-1.2) L6(-2.8,-1.2) L7(-2,-1.2) L8(-1.2,-1.2) L9(-0.4,-1.2) L10(0.4,-1.2) L11(1.2,-1.2) L12(2,-1.2) L13(2.8,-1.2) L14(3.6,-1.2) L15(4.4,-1.2) L16(5.2,-1.2) L17(6,-1.2) L18(6.8,-1.2) M1(-6.8,-2) M2(-6,-2) M3(-5.2,-2) M4(-4.4,-2) M5(-3.6,-2) M6(-2.8,-2) M7(-2,-2) M8(-1.2,-2) M9(-0.4,-2) M10(0.4,-2) M11(1.2,-2) M12(2,-2) M13(2.8,-2) M14(3.6,-2) M15(4.4,-2) M16(5.2,-2) M17(6,-2) M18(6.8,-2) N1(-6.8,-2.8) N2(-6,-2.8) N3(-5.2,-2.8) N4(-4.4,-2.8) N5(-3.6,-2.8) N6(-2.8,-2.8) N7(-2,-2.8) N8(-1.2,-2.8) N9(-0.4,-2.8) N10(0.4,-2.8) N11(1.2,-2.8) N12(2,-2.8) N13(2.8,-2.8) N14(3.6,-2.8) N15(4.4,-2.8) N16(5.2,-2.8) N17(6,-2.8) N18(6.8,-2.8) P1(-6.8,-3.6) P2(-6,-3.6) P3(-5.2,-3.6) P4(-4.4,-3.6) P5(-3.6,-3.6) P6(-2.8,-3.6) P7(-2,-3.6) P8(-1.2,-3.6) P9(-0.4,-3.6) P10(0.4,-3.6) P11(1.2,-3.6) P12(2,-3.6) P13(2.8,-3.6) P14(3.6,-3.6) P15(4.4,-3.6) P16(5.2,-3.6) P17(6,-3.6) P18(6.8,-3.6) R1(-6.8,-4.4) R2(-6,-4.4) R3(-5.2,-4.4) R4(-4.4,-4.4) R5(-3.6,-4.4) R6(-2.8,-4.4) R7(-2,-4.4) R8(-1.2,-4.4) R9(-0.4,-4.4) R10(0.4,-4.4) R11(1.2,-4.4) R12(2,-4.4) R13(2.8,-4.4) R14(3.6,-4.4) R15(4.4,-4.4) R16(5.2,-4.4) R17(6,-4.4) R18(6.8,-4.4) T1(-6.8,-5.2) T2(-6,-5.2) T3(-5.2,-5.2) T4(-4.4,-5.2) T5(-3.6,-5.2) T6(-2.8,-5.2) T7(-2,-5.2) T8(-1.2,-5.2) T9(-0.4,-5.2) T10(0.4,-5.2) T11(1.2,-5.2) T12(2,-5.2) T13(2.8,-5.2) T14(3.6,-5.2) T15(4.4,-5.2) T16(5.2,-5.2) T17(6,-5.2) T18(6.8,-5.2) U1(-6.8,-6) U2(-6,-6) U3(-5.2,-6) U4(-4.4,-6) U5(-3.6,-6) U6(-2.8,-6) U7(-2,-6) U8(-1.2,-6) U9(-0.4,-6) U10(0.4,-6) U11(1.2,-6) U12(2,-6) U13(2.8,-6) U14(3.6,-6) U15(4.4,-6) U16(5.2,-6) U17(6,-6) U18(6.8,-6) V1(-6.8,-6.8) V2(-6,-6.8) V3(-5.2,-6.8) V4(-4.4,-6.8) V5(-3.6,-6.8) V6(-2.8,-6.8) V7(-2,-6.8) V8(-1.2,-6.8) V9(-0.4,-6.8) V10(0.4,-6.8) V11(1.2,-6.8) V12(2,-6.8) V13(2.8,-6.8) V14(3.6,-6.8) V15(4.4,-6.8) V16(5.2,-6.8) V17(6,-6.8) V18(6.8,-6.8)
  silkscreen extent -8.27,-7.5 7.5,7.5, body extent -7.5,-7.5 7.5,7.5, height 1.5
DSUB1.385-2H9 [mm] "Connector; D Subminiature; 9 Position; Right Angle; Pitch 1.385 mm"
  rect 1.69x1.69 hole 1.09: 1(-5.54,-10.92)
  round 1.69 hole 1.09: 2(-2.77,-10.92) 3(0,-10.92) 4(2.77,-10.92) 5(5.54,-10.92) 6(-4.155,-8.08) 7(-1.385,-8.08) 8(1.385,-8.08) 9(4.155,-8.08)
  round 4.76 hole 3.26: 10(-12.495,-9.5) 11(12.495,-9.5)
  silkscreen extent -15.4,-12.4 15.4,6
ENMR-BGA112 [mm] "BGA, 112-Balls, Body 10x10mm, Pitch 0.8mm"
  round 0.45 smd: A1(-4,4) A2(-3.2,4) A3(-2.4,4) A4(-1.6,4) A5(-0.8,4) A6(0,4) A7(0.8,4) A8(1.6,4) A9(2.4,4) A10(3.2,4) A11(4,4) B1(-4,3.2) B2(-3.2,3.2) B3(-2.4,3.2) B4(-1.6,3.2) B5(-0.8,3.2) B6(0,3.2) B7(0.8,3.2) B8(1.6,3.2) B9(2.4,3.2) B10(3.2,3.2) B11(4,3.2) C1(-4,2.4) C2(-3.2,2.4) C3(-2.4,2.4) C4(-1.6,2.4) C5(-0.8,2.4) C6(0,2.4) C7(0.8,2.4) C8(1.6,2.4) C9(2.4,2.4) C10(3.2,2.4) C11(4,2.4) D1(-4,1.6) D2(-3.2,1.6) D3(-2.4,1.6) D4(-1.6,1.6) D5(-0.8,1.6) D6(0,1.6) D7(0.8,1.6) D8(1.6,1.6) D9(2.4,1.6) D10(3.2,1.6) D11(4,1.6) E1(-4,0.8) E2(-3.2,0.8) E3(-2.4,0.8) E4(-1.6,0.8) E5(-0.8,0.8) E6(0,0.8) E7(0.8,0.8) E8(1.6,0.8) E9(2.4,0.8) E10(3.2,0.8) E11(4,0.8) F1(-4,0) F2(-3.2,0) F3(-2.4,0) F4(-1.6,0) F5(-0.8,0) F6(0,0) F7(0.8,0) F8(1.6,0) F9(2.4,0) F10(3.2,0) F11(4,0) G1(-4,-0.8) G2(-3.2,-0.8) G3(-2.4,-0.8) G4(-1.6,-0.8) G5(-0.8,-0.8) G6(0,-0.8) G7(0.8,-0.8) G8(1.6,-0.8) G9(2.4,-0.8) G10(3.2,-0.8) G11(4,-0.8) H1(-4,-1.6) H2(-3.2,-1.6) H3(-2.4,-1.6) H4(-1.6,-1.6) H5(-0.8,-1.6) H6(0,-1.6) H7(0.8,-1.6) H8(1.6,-1.6) H9(2.4,-1.6) H10(3.2,-1.6) H11(4,-1.6) J1(-4,-2.4) J2(-3.2,-2.4) J3(-2.4,-2.4) J4(-1.6,-2.4) J5(-0.8,-2.4) J6(0,-2.4) J7(0.8,-2.4) J8(1.6,-2.4) J9(2.4,-2.4) J10(3.2,-2.4) J11(4,-2.4) K1(-4,-3.2) K2(-3.2,-3.2) K3(-2.4,-3.2) K4(-1.6,-3.2) K5(-0.8,-3.2) K6(0,-3.2) K7(0.8,-3.2) K8(1.6,-3.2) K9(2.4,-3.2) K10(3.2,-3.2) K11(4,-3.2) L1(-4,-4) L2(-3.2,-4) L3(-2.4,-4) L4(-1.6,-4) L5(-0.8,-4) L6(0,-4) L7(0.8,-4) L8(1.6,-4) L9(2.4,-4) L10(3.2,-4) L11(4,-4)
  silkscreen extent -5.77,-5 5,5, body extent -5,-5 5,5, height 1.3
HDMI-type-A [mm]
  rect 0.3x1.9 smd: 1(12,1.2) 2(11.5,1.2) 3(11,1.2) 4(10.5,1.2) 5(10,1.2) 6(9.5,1.2) 7(9,1.2) 8(8.5,1.2) 9(8,1.2) 10(7.5,1.2) 11(7,1.2) 12(6.5,1.2) 13(6,1.2) 14(5.5,1.2) 15(5,1.2) 16(4.5,1.2) 17(4,1.2) 18(3.5,1.2) 19(3,1.2)
  round 1.524 hole 1.3: ""(-0.6,-4.9) ""(0,0) ""(14.5,0) ""(15.1,-4.9)
  silkscreen extent -1.95,-6.01 16.52,2.97
HDR1X2 [mm] "Connector; Header; 2 Position"
  rect 1.5x1.5 hole 0.9: 1(0,0)
  round 1.5 hole 0.9: 2(2.54,0)
  silkscreen extent -1.27,-1.27 3.81,1.27
HDR1X3 [mm] "Connector; Header; 3 Position"
  rect 1.5x1.5 hole 0.9: 1(0,0)
  round 1.5 hole 0.9: 2(2.54,0) 3(5.08,0)
  silkscreen extent -1.27,-1.27 6.35,1.27
HDR1X11H [mm] "Connector; Header; 11 Position; Right Angle"
  rect 1.5x1.5 hole 0.9: 1(0,0)
  round 1.5 hole 0.9: 2(2.54,0) 3(5.08,0) 4(7.62,0) 5(10.16,0) 6(12.7,0) 7(15.24,0) 8(17.78,0) 9(20.32,0) 10(22.86,0) 11(25.4,0)
  silkscreen extent -1.27,-6.35 26.67,-1.27
HDR2X2 [mm] "Connector; Header; 2x2 Position"
  rect 1.5x1.5 hole 0.9: 1(0,0)
  round 1.5 hole 0.9: 2(0,2.54) 3(2.54,0) 4(2.54,2.54)
  silkscreen extent -1.27,-1.27 3.81,3.81
HDR2X4 [mm] "Connector; Header; 4x2 Position"
  rect 1.5x1.5 hole 0.9: 1(0,0)
  round 1.5 hole 0.9: 2(0,2.54) 3(2.54,0) 4(2.54,2.54) 5(5.08,0) 6(5.08,2.54) 7(7.62,0) 8(7.62,2.54)
  silkscreen extent -1.27,-1.27 8.89,3.81
HDR2X5 [mm] "Connector; Header; 5x2 Position"
  rect 1.5x1.5 hole 0.9: 1(0,0)
  round 1.5 hole 0.9: 2(0,2.54) 3(2.54,0) 4(2.54,2.54) 5(5.08,0) 6(5.08,2.54) 7(7.62,0) 8(7.62,2.54) 9(10.16,0) 10(10.16,2.54)
  silkscreen extent -1.27,-1.27 11.43,3.81
HDR2X8 [mm] "Connector; Header; 8x2 Position"
  rect 1.5x1.5 hole 0.9: 1(0,0)
  round 1.5 hole 0.9: 2(0,2.54) 3(2.54,0) 4(2.54,2.54) 5(5.08,0) 6(5.08,2.54) 7(7.62,0) 8(7.62,2.54) 9(10.16,0) 10(10.16,2.54) 11(12.7,0) 12(12.7,2.54) 13(15.24,0) 14(15.24,2.54) 15(17.78,0) 16(17.78,2.54)
  silkscreen extent -1.27,-1.27 19.05,3.81
HDR2X10 [mm] "Connector; Header; 10x2 Position"
  rect 1.5x1.5 hole 0.9: 1(0,0)
  round 1.5 hole 0.9: 2(0,2.54) 3(2.54,0) 4(2.54,2.54) 5(5.08,0) 6(5.08,2.54) 7(7.62,0) 8(7.62,2.54) 9(10.16,0) 10(10.16,2.54) 11(12.7,0) 12(12.7,2.54) 13(15.24,0) 14(15.24,2.54) 15(17.78,0) 16(17.78,2.54) 17(20.32,0) 18(20.32,2.54) 19(22.86,0) 20(22.86,2.54)
  silkscreen extent -1.27,-1.27 24.13,3.81
HDR2X16 [mm] "Connector; Header; 16x2 Position"
  rect 1.5x1.5 hole 0.9: 1(0,0)
  round 1.5 hole 0.9: 2(0,2.54) 3(2.54,0) 4(2.54,2.54) 5(5.08,0) 6(5.08,2.54) 7(7.62,0) 8(7.62,2.54) 9(10.16,0) 10(10.16,2.54) 11(12.7,0) 12(12.7,2.54) 13(15.24,0) 14(15.24,2.54) 15(17.78,0) 16(17.78,2.54) 17(20.32,0) 18(20.32,2.54) 19(22.86,0) 20(22.86,2.54) 21(25.4,0) 22(25.4,2.54) 23(27.94,0) 24(27.94,2.54) 25(30.48,0) 26(30.48,2.54) 27(33.02,0) 28(33.02,2.54) 29(35.56,0) 30(35.56,2.54) 31(38.1,0) 32(38.1,2.54)
  silkscreen extent -1.27,-1.27 39.37,3.81
HDR2X19 [mm] "Connector; Header; 19x2 Position"
  rect 1.5x1.5 hole 0.9: 1(0,0)
  round 1.5 hole 0.9: 2(0,2.54) 3(2.54,0) 4(2.54,2.54) 5(5.08,0) 6(5.08,2.54) 7(7.62,0) 8(7.62,2.54) 9(10.16,0) 10(10.16,2.54) 11(12.7,0) 12(12.7,2.54) 13(15.24,0) 14(15.24,2.54) 15(17.78,0) 16(17.78,2.54) 17(20.32,0) 18(20.32,2.54) 19(22.86,0) 20(22.86,2.54) 21(25.4,0) 22(25.4,2.54) 23(27.94,0) 24(27.94,2.54) 25(30.48,0) 26(30.48,2.54) 27(33.02,0) 28(33.02,2.54) 29(35.56,0) 30(35.56,2.54) 31(38.1,0) 32(38.1,2.54) 33(40.64,0) 34(40.64,2.54) 35(43.18,0) 36(43.18,2.54) 37(45.72,0) 38(45.72,2.54)
  silkscreen extent -1.27,-1.27 46.99,3.81
HDR2X30 [mm] "Connector; Header; 30x2 Position"
  rect 1.5x1.5 hole 0.9: 1(0,0)
  round 1.5 hole 0.9: 2(0,2.54) 3(2.54,0) 4(2.54,2.54) 5(5.08,0) 6(5.08,2.54) 7(7.62,0) 8(7.62,2.54) 9(10.16,0) 10(10.16,2.54) 11(12.7,0) 12(12.7,2.54) 13(15.24,0) 14(15.24,2.54) 15(17.78,0) 16(17.78,2.54) 17(20.32,0) 18(20.32,2.54) 19(22.86,0) 20(22.86,2.54) 21(25.4,0) 22(25.4,2.54) 23(27.94,0) 24(27.94,2.54) 25(30.48,0) 26(30.48,2.54) 27(33.02,0) 28(33.02,2.54) 29(35.56,0) 30(35.56,2.54) 31(38.1,0) 32(38.1,2.54) 33(40.64,0) 34(40.64,2.54) 35(43.18,0) 36(43.18,2.54) 37(45.72,0) 38(45.72,2.54) 39(48.26,0) 40(48.26,2.54) 41(50.8,0) 42(50.8,2.54) 43(53.34,0) 44(53.34,2.54) 45(55.88,0) 46(55.88,2.54) 47(58.42,0) 48(58.42,2.54) 49(60.96,0) 50(60.96,2.54) 51(63.5,0) 52(63.5,2.54) 53(66.04,0) 54(66.04,2.54) 55(68.58,0) 56(68.58,2.54) 57(71.12,0) 58(71.12,2.54) 59(73.66,0) 60(73.66,2.54)
  silkscreen extent -1.27,-1.27 75.06,3.81
MC-306 [mm] "SOJ, 4-Leads, Body 8.00x3.75mm, Pitch 5.50mm, IPC Low Density"
  rect 1.9x1.3 smd: 1(-1.6,2.75) 2(-1.6,-2.75) 3(1.6,-2.75) 4(1.6,2.75)
  silkscreen extent -1.72,-4 0.1,4.08, body extent -1.6,-4 1.6,4, height 2.54
MOLX-67503-1020_V [mm] "Mini USB Connector, SMT, Righer Angle"
  rrect50% 2.8x0.5 smd: 1(0,0) 2(0,-0.8) 3(0,-1.6) 4(0,-2.4) 5(0,-3.2)
  rrect50% 3.5x2.05 smd: 6(0.025,3.325) 8(0.025,-6.525)
  rrect50% 4x2.05 smd: 7(-4.225,3.325) 9(-4.225,-6.525)
  round 0.9 hole 0.9 unplated: X(-2.325,-3.8) Y(-2.325,0.6)
  silkscreen extent -8.25,-4.85 2,1.65, body extent -8.22,-6.56 0.78,3.34, height 3.95
OSCI-4FPGA [mm] "DFN3127P600-8N"
  rect 2x1.8 smd: 1(-2.1,2.54) 2(-2.1,-2.54) 3(2.1,-2.54) 4(2.1,2.54)
  silkscreen extent -2.65,4.1 -2.55,4.2, body extent -2.6,-3.75 2.6,3.75, height 1.45
RESC1206(3216)_L [mm] "Chip Resistor, Body 3.2x1.6mm, IPC High Density"
  rect 0.95x1.7 smd: 1(-1.35,0) 2(1.35,0)
  silkscreen extent -0.5,-0.75 0.5,0.75, body extent -1.67,-0.87 1.67,0.87, height 0.75
SMD-0603 [mm] "Chip Inductor, 2-Leads, Body 1.6x0.8mm"
  rect 0.85x0.7 smd: 1(-0.775,0) 2(0.775,0)
  body extent -0.8,-0.4 0.8,0.4, height 0.79
SOT95P275X140-5N [mm] "SOT23, 5-Leads, Body 2,98x2,75mm, Pitch 0,95mm, IPC Medium Density"
  rect 1x0.7 smd: 1(-1.2,0.95) 2(-1.2,0) 3(-1.2,-0.95) 4(1.2,-0.95) 5(1.2,0.95)
  silkscreen extent -1.32,-1.55 0.5,1.97, body extent -0.87,-1.55 0.87,1.55, height 1.4
SOT223_N [mm] "SOT223, 4-Leads, Body 6.5x3.5mm, Pitch 2.3mm, Lead Span 7mm, IPC Medium Density"
  rect 2.4x1 smd: 1(-2.9,2.3) 2(-2.9,0) 3(-2.9,-2.3)
  rect 2.4x3.3 smd: 4(2.9,0)
  silkscreen extent -3.02,-3.35 1.4,3.48, body extent -1.85,-3.35 1.85,3.35, height 1.7
TI-DB16_L [mm] "SOP, 16-Leads, Body 6.2x5.3mm, Pitch 0.65mm, IPC High Density"
  oval 1.8x0.45 smd: 1(-3.4,2.275) 2(-3.4,1.625) 3(-3.4,0.975) 4(-3.4,0.325) 5(-3.4,-0.325) 6(-3.4,-0.975) 7(-3.4,-1.625) 8(-3.4,-2.275) 9(3.4,-2.275) 10(3.4,-1.625) 11(3.4,-0.975) 12(3.4,-0.325) 13(3.4,0.325) 14(3.4,0.975) 15(3.4,1.625) 16(3.4,2.275)
  silkscreen extent -3.52,-3.25 2.1,3.25, body extent -2.8,-3.25 2.8,3.25, height 2
WE-CNSW-1206 [mm] "SMD Inductor, 4-Leads, Body 1.8 x 3.4 mm"
  rect 1.1x0.6 smd: 1(-1.35,0.5) 2(1.35,0.5) 3(1.35,-0.5) 4(-1.35,-0.5)
  body extent -1.6,-0.8 1.6,0.8, height 1.88
XTAL-85 [mm] "Molded Capacitor, 2-Leads, Body 8.00x4.49mm, IPC Medium Density"
  rect 2.5x3 smd: 1(-3.25,0) 2(3.25,0)
  silkscreen extent -4.1,-2.35 4.1,2.35, body extent -4.08,-2.32 4.07,2.32, height 1.4

## Part data
Arm_prog: "Header, 10-Pin, Dual row"
C1 C2 C3 C8 C9 C10 C14 C15 C16 C17 C18 C19 C20 C21 C22 C23 C24 C27 C28 C29 C30 C31 C32 C33 C34 C35 C36 C37 C38 C39 C40 C41 C42 C43 C44 C45 C46 C47 C48 C49 C50 C51 C52 C53 C54 C55 C56 C57 C58 C59 C60: library part "Cap Semi", "Capacitor (Semiconductor SIM Model)"
C4 C5 C6 C7 C11 C12 C13 C61: library part CMP-1038-01663-1, "CAP 100nF 100V ±5% 1210 (3225 Metric) Thickness 1.05mm SMD"
C25 C26: library part Cap2, "Capacitor"
CLK_JMP: "Header, 2-Pin"
D1 D2 D3 D4 D5 D6: "Typical RED, GREEN, YELLOW, AMBER GaAs LED"
EBI_address: library part "Header 30X2", "Header, 30-Pin, Dual row"
EBI_DATA: library part "Header 16X2", "Header, 16-Pin, Dual row"
FPGA: library part CMP-0067-00402-1, "Spartan-6 LX 1.2V FPGA, 218 User I/Os, 324-Ball Chip-Scale BGA (0.8mm Pitch), Speed Grade 2, Industrial Grade, Pb-Free"
FPGA_CLK P2: library part "Header 2X2", "Header, 2-Pin, Dual row"
FPGA_RESET: library part switch-button
GPIO MEM1_CTRL MEM2_CTRL: "Header, 4-Pin, Dual row"
HDMI_header SP_H: "Header, 8-Pin, Dual row"
J1_VGA1 J1_VGA2 J2_VGA1 J2_VGA2: "Header, 11-Pin, Right Angle"
JTAG: library part "Header 5X2", "Header, 5-Pin, Dual row"
L1 L3 L4 L5 L6: library part CMP-0220-00171-1, "SMD EMI Suppression Ferrite Bead WE-CBF, Z = 300 Ohm"
L2: library part CMP-0222-00033-1, "SMD Common Mode Noise Suppressor WE-CNSW, Z = 160 Ohm"
MCU: library part CMP-0270-00024-1, "EFM32 Giant Gecko, M3 ARM Cortex CPU, 1024 KB Flash, 128 KB RAM, 1.85 - 3.8 V Supply, 48 MHz Max Speed, -40 to 85 degC, 112-Pin BGA, RoHS Compliant"
MCU_RESET: library part switch-button, "Reset button"
MEM1_ADDR MEM2_ADDR: "Header, 19-Pin, Dual row"
MEM1_DATA MEM2_DATA: "Header, 16-Pin, Dual row"
MEMORY1 MEMORY2: library part memchip-AS7C38098A
P1 P3 P9_VGA1 P9_VGA2: library part "Header 2", "Header, 2-Pin"
P4: "Header, 3-Pin"
P5 P6 P7: library part "Header 3", "Header, 3-Pin"
P8_VGA1 P8_VGA2: "Header, 2-Pin, Dual row"
R1 R2 R3 R4 R7 R8: "Resistor"
R5 R6: library part Res3, "Resistor"
R25: library part CMP-1014-00056-1, "105R 0.25W 5% 1206 (3216 Metric)  SMD"
SP_CON: "Receptacle Assembly, 9 Position, Right Angle"
SPD: library part CMP-0299-01177-1, "3-V to 5.5-V Multichannel RS-232 Line Driver / Receiver with ±15-kV ESD Protection, 0 to 70 degC, 16-Pin SSOP (DB), Green (RoHS & no Sb/Br)"
SPI_HEADER: library part "Header 4X2", "Header, 4-Pin, Dual row"
USB_DATA USB_POWER: library part CMP-0411-00002-1, "USB, MINI, SMD, RA KME04-USBMU03A01"
USB_ESD: library part WE-TVS-HS,SOT23-5L,824011, "TVS Diode WE-TVS-HS, VRWM=5V"
VR1: library part CMP-0786-00156-1, "High Accuracy, Ultralow IQ, 1.5 A, anyCAP Low Dropout Regulator, 2.8 to 6 V Vin, 3.3 V Vout, Industrial, 3-pin SOT223 (KC-3), Reel"
VR2: library part LM1084IT-3.3, "5A Low Dropout Positive Regulators, 3-pin TO-220"
XHIGH XLOW: library part XTAL, "Crystal Oscillator"

## Via types
v1: diameter 0.4, hole 0.2, Top Layer to Bottom Layer, 599 vias
v2: diameter 0.4, hole 0.2, Top Layer to Bottom Layer, tented top, 8 vias
v3: diameter 7, hole 5, Top Layer to Bottom Layer, 4 vias
v4: diameter 1.3, hole 0.9, Top Layer to Bottom Layer, 3 vias
v5: diameter 2.1, hole 1.6, Top Layer to Bottom Layer, 1 vias

## Nets (pads, with @x,y where several pads share a name; then routed paths per layer and width w, separated by ;. In a path a pad name is that pad's centre, name@x,y a point inside that pad or via, vN(x,y) a via of type N, cw(c..) or ccw(c..) an arc to the next point about the centre after c; other vN are vias at no path point)
1.2V: C12.2 C13.2 C30.2 C57.2 C58.2 C59.1 C60.1 C61.2 FPGA.G7 FPGA.H9 FPGA.H11 FPGA.J8 FPGA.J10 FPGA.K9 FPGA.K11 FPGA.L8 FPGA.L10 FPGA.M7 FPGA.M12 R25.1 VR2.2 | length 194.1
  Top Layer w0.1: C61.2@100.825,91.91 100.825,93.002 100.935,93.112 C30.2@100.935,97.655 ; FPGA.M7@145.047,178.207 FPGA.M7@145.07,178.23 145.45,178.61 145.453,178.613 v2@145.491,178.613 ; FPGA.K9@146.67,179.83 FPGA.K9@146.69,179.83 ; v2(147.13,180.19) v2@147.13,180.21 ; v2(147.868,179.469) 147.909,179.469 FPGA.K11@148.27,179.83
  Top Layer w0.2: FPGA.G7@145.05,182.21 145.167,182.21 v2(145.548,181.829) ; v2(145.56,180.21) 145.56,180.32 FPGA.J8@145.87,180.63 ; v2(146.308,181.169) 146.549,181.41 146.65,181.41 FPGA.H9@146.67,181.43 ; FPGA.K9@146.69,179.83 v2(147.13,180.19) ; v2@147.13,180.21 FPGA.J10@147.51,180.59 ; v2@147.83,181.02 148.217,181.407 FPGA.H11@148.27,181.43
  Top Layer w0.254: FPGA.M7@145.047,178.207 v2@145.45,178.61 ; v2@145.46,178.62 145.847,179.007 FPGA.L8@145.87,179.03 ; v2@147.07,178.63 147.447,179.007 FPGA.L10@147.47,179.03 ; v1(148.64,177.83) 149.017,178.207 FPGA.M12@149.07,178.23
  Top Layer w0.8: C12.2@100.825,80.04 104.4,83.615 104.4,85.1 103.73,85.77 C13.2@100.825,85.77 C61.2@100.825,91.91 ; C61.2@100.935,92.02 C30.2@100.935,97.655 ; C30.2@101.25,97.97 R25.1@106.15,97.97 ; R25.1@106.16,97.96 106.16,101.45 108.05,103.34 v4@109.65,103.34 ; VR2.2@109.906,85.406 109.96,85.46 v4(109.96,87.71)
  layer 4 w0.1: v2@145.491,178.613 v2@145.537,178.659
  Bottom Layer w0.1: v2(145.478,178.649) 146.253,179.424 146.253,180.238 ; C57.2@147.936,165.983 148.234,165.983 148.234,166.116 148.02,166.116 C57.2@148.02,166.224
  Bottom Layer w0.2: v2@145.45,178.62 146.249,177.82 ; v2(145.56,180.21) 145.56,180.1 146.26,179.4 ; v2@145.58,181.8 146.26,181.12 v2@146.33,181.12 ; 146.26,178.11 146.809,178.659 v2(147.088,178.659) ; v2(147.13,180.19) 148.7,180.19 ; v2@147.85,179.44 148.43,180.02 148.87,180.02 ; v1(148.64,177.83) 148.97,177.5 149.49,177.5
  Bottom Layer w0.4: v2@146.26,181.12 146.26,167.01 C57.2@147.37,165.9 ; v2@147.87,181.02 148.7,180.19 ; C57.2@148.02,166.224 C57.2@148.152,166.013 ; C57.2@148.223,166.013 149.49,167.28 149.49,177.19 149.49,179.38 148.43,180.44
  Bottom Layer w0.8: v4@104.4,85.18 106.9,87.68 v4@110.08,87.68 ; v4@109.65,103.34 109.65,132.68 131,154.03 134.72,154.03 138.23,157.54 138.23,164.005 ; C60.1@130.41,165.983 C59.1@136.252,165.983 138.23,164.005 ; C57.2@148.223,166.013 142.544,166.013 140.208,165.983 138.23,164.005
  other v2: 147.888,181.049
  other v4: 104.37,85.14 109.56,103.31
3.3V: Arm_prog.1 C2.2 C3.2 C5.2 C6.2 C7.2 C8.2 C9.2 C10.2 C14.2 C15.2 C16.2 C18.2 C19.2 C20.1 C25.1 C28.2 C34.1 C36.1 C37.1 C38.2 C39.2 C40.1 C41.1 C42.1 C43.2 C44.1 C45.1 C46.2 C47.2 C48.1 C49.1 C50.2 C51.2 C52.2 C53.2 C54.1 C55.1 C56.1 D1.1 FPGA.B1 FPGA.B5 FPGA.B10 FPGA.B15 FPGA.B17 FPGA.D7 FPGA.D13 FPGA.E2 FPGA.E5 FPGA.E9 FPGA.E10 FPGA.E14 FPGA.E17 FPGA.G4 FPGA.G10 FPGA.G15 FPGA.J2 FPGA.J5 FPGA.J12 FPGA.J14 FPGA.J17 FPGA.K7 FPGA.M4 FPGA.M9 FPGA.M15 FPGA.P5 FPGA.P9 FPGA.P10 FPGA.P14 FPGA.R2 FPGA.R6 FPGA.R12 FPGA.R17 FPGA.U4 FPGA.U9 FPGA.U14 FPGA_CLK.4 FPGA_RESET.2 FPGA_RESET.4 MCU.B11 MCU.D5 MCU.D7 MCU.F8 MCU.G4 MCU.G8 MCU.H7 MCU.K8 MCU.K9 MCU.L4 MCU.L10 MEMORY1.11 MEMORY1.33 MEMORY2.11 MEMORY2.33 R8.2 VR1.2 | length 86.8
  Top Layer w0.1: FPGA_RESET.2@72.6,216.62 v1(73.95,216.62) ; FPGA_RESET.4@72.6,221.12 v1(73.95,221.12) ; MEMORY2.33@98.794,180.359 99.773,180.359 99.894,180.238 v1(99.894,179.953) ; v1(108.284,179.559) MEMORY2.11@109.994,179.559 ; v1(139.429,116.948) 139.429,117.354 MCU.L4@139.829,117.754 ; v1(139.429,120.554) MCU.G4@139.829,120.954 ; v1(139.87,186.63) FPGA.B1@140.27,186.23 ; v1(140.229,123.754) MCU.D5@140.629,123.354 ; v1(140.67,175.43) FPGA.R2@141.07,175.83 ; v1(140.67,181.03) FPGA.J2@141.07,180.63 ; v1(140.67,184.23) FPGA.E2@141.07,183.83 ; MCU.H7@142.229,120.154 v1(142.629,119.754) ; MCU.D7@142.229,123.354 v1(142.629,123.754) ; v1(142.27,173.83) FPGA.U4@142.67,174.23 ; v1(142.27,177.83) FPGA.M4@142.67,178.23 ; v1(142.27,182.63) FPGA.G4@142.67,182.23 ; FPGA_CLK.4@142.494,161.374 v1(142.494,162.674) ; v1(142.61,82.24) C28.2@143.76,82.24 ; MCU.K8@143.029,118.554 v1(143.429,118.154) ; MCU.G8@143.029,120.954 v1(143.429,120.554) ; MCU.F8@143.029,121.754 v1(143.429,121.354) ; v1(143.07,176.23) FPGA.P5@143.47,176.63 ; v1(143.07,181.03) FPGA.J5@143.47,180.63 ; v1(143.07,184.23) FPGA.E5@143.47,183.83 ; v1(143.07,186.63) FPGA.B5@143.47,186.23 ; MCU.K9@143.829,118.554 v1(144.229,118.154) ; v1(143.87,175.43) FPGA.R6@144.27,175.83 ; MCU.L10@144.629,117.754 v1(145.029,117.354) ; v1(144.67,179.43) FPGA.K7@145.07,179.83 ; v1(144.67,185.03) FPGA.D7@145.07,184.63 ; MCU.B11@145.429,124.954 v1(145.829,125.354) ; v1(146.27,184.23) FPGA.E9@146.67,183.83 ; FPGA.U9@146.67,174.23 146.95,173.95 v1(146.95,173.88) ; FPGA.P9@146.67,176.63 v1(147.07,177.03) ; FPGA.M9@146.67,178.23 v1(147.07,177.83) ; FPGA.P10@147.47,176.63 v1(147.87,176.23) ; FPGA.G10@147.47,182.23 v1(147.87,182.63) ; FPGA.E10@147.47,183.83 v1(147.87,184.23) ; FPGA.B10@147.47,186.23 v1(147.87,186.63) ; v1(148.67,175.43) FPGA.R12@149.07,175.83 ; FPGA.J12@149.07,180.63 v1(149.47,181.03) ; FPGA.D13@149.87,184.63 v1(150.27,185.03) ; FPGA.U14@150.67,174.23 v1(151.07,173.83) ; FPGA.P14@150.67,176.63 v1(151.07,176.23) ; FPGA.J14@150.67,180.63 v1(151.07,181.03) ; FPGA.E14@150.67,183.83 v1(151.07,184.23) ; FPGA.M15@151.47,178.23 v1(151.87,177.83) ; FPGA.G15@151.47,182.23 v1(151.87,182.63) ; FPGA.B15@151.47,186.23 v1(151.87,186.63) ; VR1.2@151.511,86.156 v1(151.511,87.531) ; FPGA.R17@153.07,175.83 v1(153.47,175.43) ; FPGA.J17@153.07,180.63 v1(153.47,181.03) ; FPGA.E17@153.07,183.83 v1(153.47,184.23) ; FPGA.B17@153.07,186.23 v1(153.47,186.63) ; v1(155.757,156.203) 155.902,156.203 156.163,156.464 C25.1@156.163,157.353 ; v1(158.915,84.91) C5.2@158.915,86.51 ; v1(160.09,94.43) D1.1@160.09,95.58 ; v1(164,82.055) C7.2@165.6,82.055 ; v1(167.285,87.68) C6.2@167.285,89.28 ; v1(168.101,207.765) R8.2@168.101,208.915 ; MEMORY1.33@192.52,180.486 v1(193.62,180.486) ; v1(202.214,179.889) 202.214,179.832 202.36,179.686 MEMORY1.11@203.72,179.686 ; v1(205.152,79.241) C34.1@205.152,80.391
  Bottom Layer w0.1: v1(125.831,187.112) C45.1@126.981,187.112 ; v1(126.085,197.381) 126.085,197.28 126.187,197.178 C46.2@127.235,197.178 ; v1(127.87,172.834) C40.1@127.87,173.984 ; v1(127.87,178.676) C44.1@127.87,179.826 ; v1(130.808,117.302) C18.2@130.808,118.452 ; v1(130.935,122.89) C20.1@130.935,124.04 ; v1(131.495,190.284) 131.901,190.69 C36.1@131.901,191.637 ; v1(131.901,172.961) C39.2@131.901,174.111 ; v1(131.901,178.803) C38.2@131.901,179.953 ; C37.1@131.901,185.795 131.901,184.848 v1(132.104,184.645) ; v1(132.108,196.075) C52.2@132.108,197.225 ; v1(132.158,128.478) C10.2@132.158,129.628 ; v1(133.281,111.206) C9.2@133.281,112.356 ; v1(137.746,128.478) C14.2@137.746,129.628 ; v1(138.404,195.654) C51.2@139.554,195.654 ; v1(138.742,111.206) C8.2@138.742,112.356 ; v1(142.928,128.478) 143.053,128.478 143.334,128.759 C16.2@143.334,129.628 ; v1(144.076,111.206) C3.2@144.076,112.356 ; v1(145.135,195.734) C50.2@146.285,195.734 ; v1(148.719,128.478) 148.922,128.681 C15.2@148.922,129.628 ; C19.2@148.969,124.548 148.969,123.601 v1(149.172,123.398) ; v1(149.41,111.206) C2.2@149.41,112.356 ; v1(150.977,195.734) C49.1@152.127,195.734 ; v1(156.819,195.734) C48.1@157.969,195.734 ; v1(160.589,186.804) C53.2@160.589,187.954 ; v1(160.89,169.024) C56.1@160.89,170.174 ; v1(160.89,174.866) C55.1@160.89,176.016 ; v1(160.89,180.708) C54.1@160.89,181.858 ; v1(160.97,163.309) C47.2@160.97,164.459 ; v1(162.788,195.654) C43.2@163.938,195.654 ; v1(163.042,180.033) C41.1@164.192,180.033 ; v1(163.042,185.461) C42.1@164.192,185.461
A0: EBI_address.60 MCU.J4 | length 29.6
  Top Layer w0.1: v1(139.421,118.962) 139.437,118.962 MCU.J4@139.829,119.354
  layer 3 w0.1: EBI_address.60@127.762,143.129 139.02,131.871 139.02,119.363 v1(139.421,118.962)
A1: EBI_address.58 MCU.K3 | length 35.2
  Top Layer w0.1: v1(138.608,118.161) 138.636,118.161 MCU.K3@139.029,118.554
  layer 3 w0.1: EBI_address.58@130.302,143.129 129.261,144.17 127.152,144.17 126.848,143.866 126.848,141.732 138.201,130.378 138.201,118.567 v1(138.608,118.161)
A2: EBI_address.56 MCU.L3 | length 29.4
  Top Layer w0.1: v1(138.623,117.348) MCU.L3@139.029,117.754
  Bottom Layer w0.1: EBI_address.56@132.842,143.129 136.124,139.847 136.124,118.816 137.185,117.754 138.217,117.754 v1(138.623,117.348)
A3: EBI_address.54 MCU.J7 | length 26.6
  Top Layer w0.1: v1(141.834,119.749) MCU.J7@142.229,119.354
  layer 3 w0.1: EBI_address.54@135.382,143.129 139.37,139.141 139.37,128.188 140.671,126.887 140.671,120.912 v1(141.834,119.749)
A4: EBI_address.52 MCU.J8 | length 27.4
  Top Layer w0.1: MCU.J8@143.029,119.354 v1(143.434,118.949)
  layer 3 w0.1: v1(142.57,132.359) 142.57,128.118 143.078,127.61 143.078,125.755 143.866,124.968 143.866,119.381 v1(143.434,118.949)
  layer 4 w0.1: EBI_address.52@137.922,143.129 137.922,137.008 v1(142.57,132.359)
A5: EBI_address.50 MCU.G10 | length 25.2
  Top Layer w0.1: MCU.G10@144.629,120.954 144.629,120.752 144.831,120.752 v1(145.034,120.548)
  layer 3 w0.1: EBI_address.50@140.462,143.129 143.332,140.259 143.332,126.898 144.678,125.552 144.678,121.209 145.034,120.853 v1(145.034,120.548)
A6: EBI_address.48 MCU.G11 | length 25.1
  Top Layer w0.1: MCU.G11@145.429,120.954 v1(145.828,120.555)
  layer 3 w0.1: EBI_address.48@143.002,143.129 146.789,139.342 146.789,121.516 v1(145.828,120.555)
A7: EBI_address.46 MCU.E9 | length 30.6
  Top Layer w0.1: v1(142.621,122.961) 142.621,122.377 142.85,122.149 143.424,122.149 MCU.E9@143.829,122.554
  layer 3 w0.1: v1(142.621,122.961) 142.011,123.571 142.011,139.421 139.548,141.884 139.548,143.789 139.802,144.043 144.628,144.043 EBI_address.46@145.542,143.129
A8: EBI_address.44 MCU.E10 | length 23.1
  Top Layer w0.1: MCU.E10@144.629,122.554 145.036,122.961 146.888,122.961 148.082,124.155 EBI_address.44@148.082,143.129
A9: EBI_address.42 MCU.D11 | length 26.3
  Top Layer w0.1: MCU.D11@145.429,123.354 146.798,123.354 147.777,124.333 147.777,141.732 147.182,142.327 147.182,143.688 147.523,144.029 149.722,144.029 EBI_address.42@150.622,143.129